# Altium PCB DPT2.2.PcbDoc (part 1 of 2)
Units mil, origin at the board's own origin, x right, y up, seen from the top; angles counter-clockwise.
Board outline 3640 x 3840 mil, 4 copper layers (Top Layer, Layer 1, Layer 2, Bottom Layer), stack 58.706 mil thick; 234 components, 56 nets, 481 pads, 759 vias.
Unrouted connection lines stored in the file: 137.
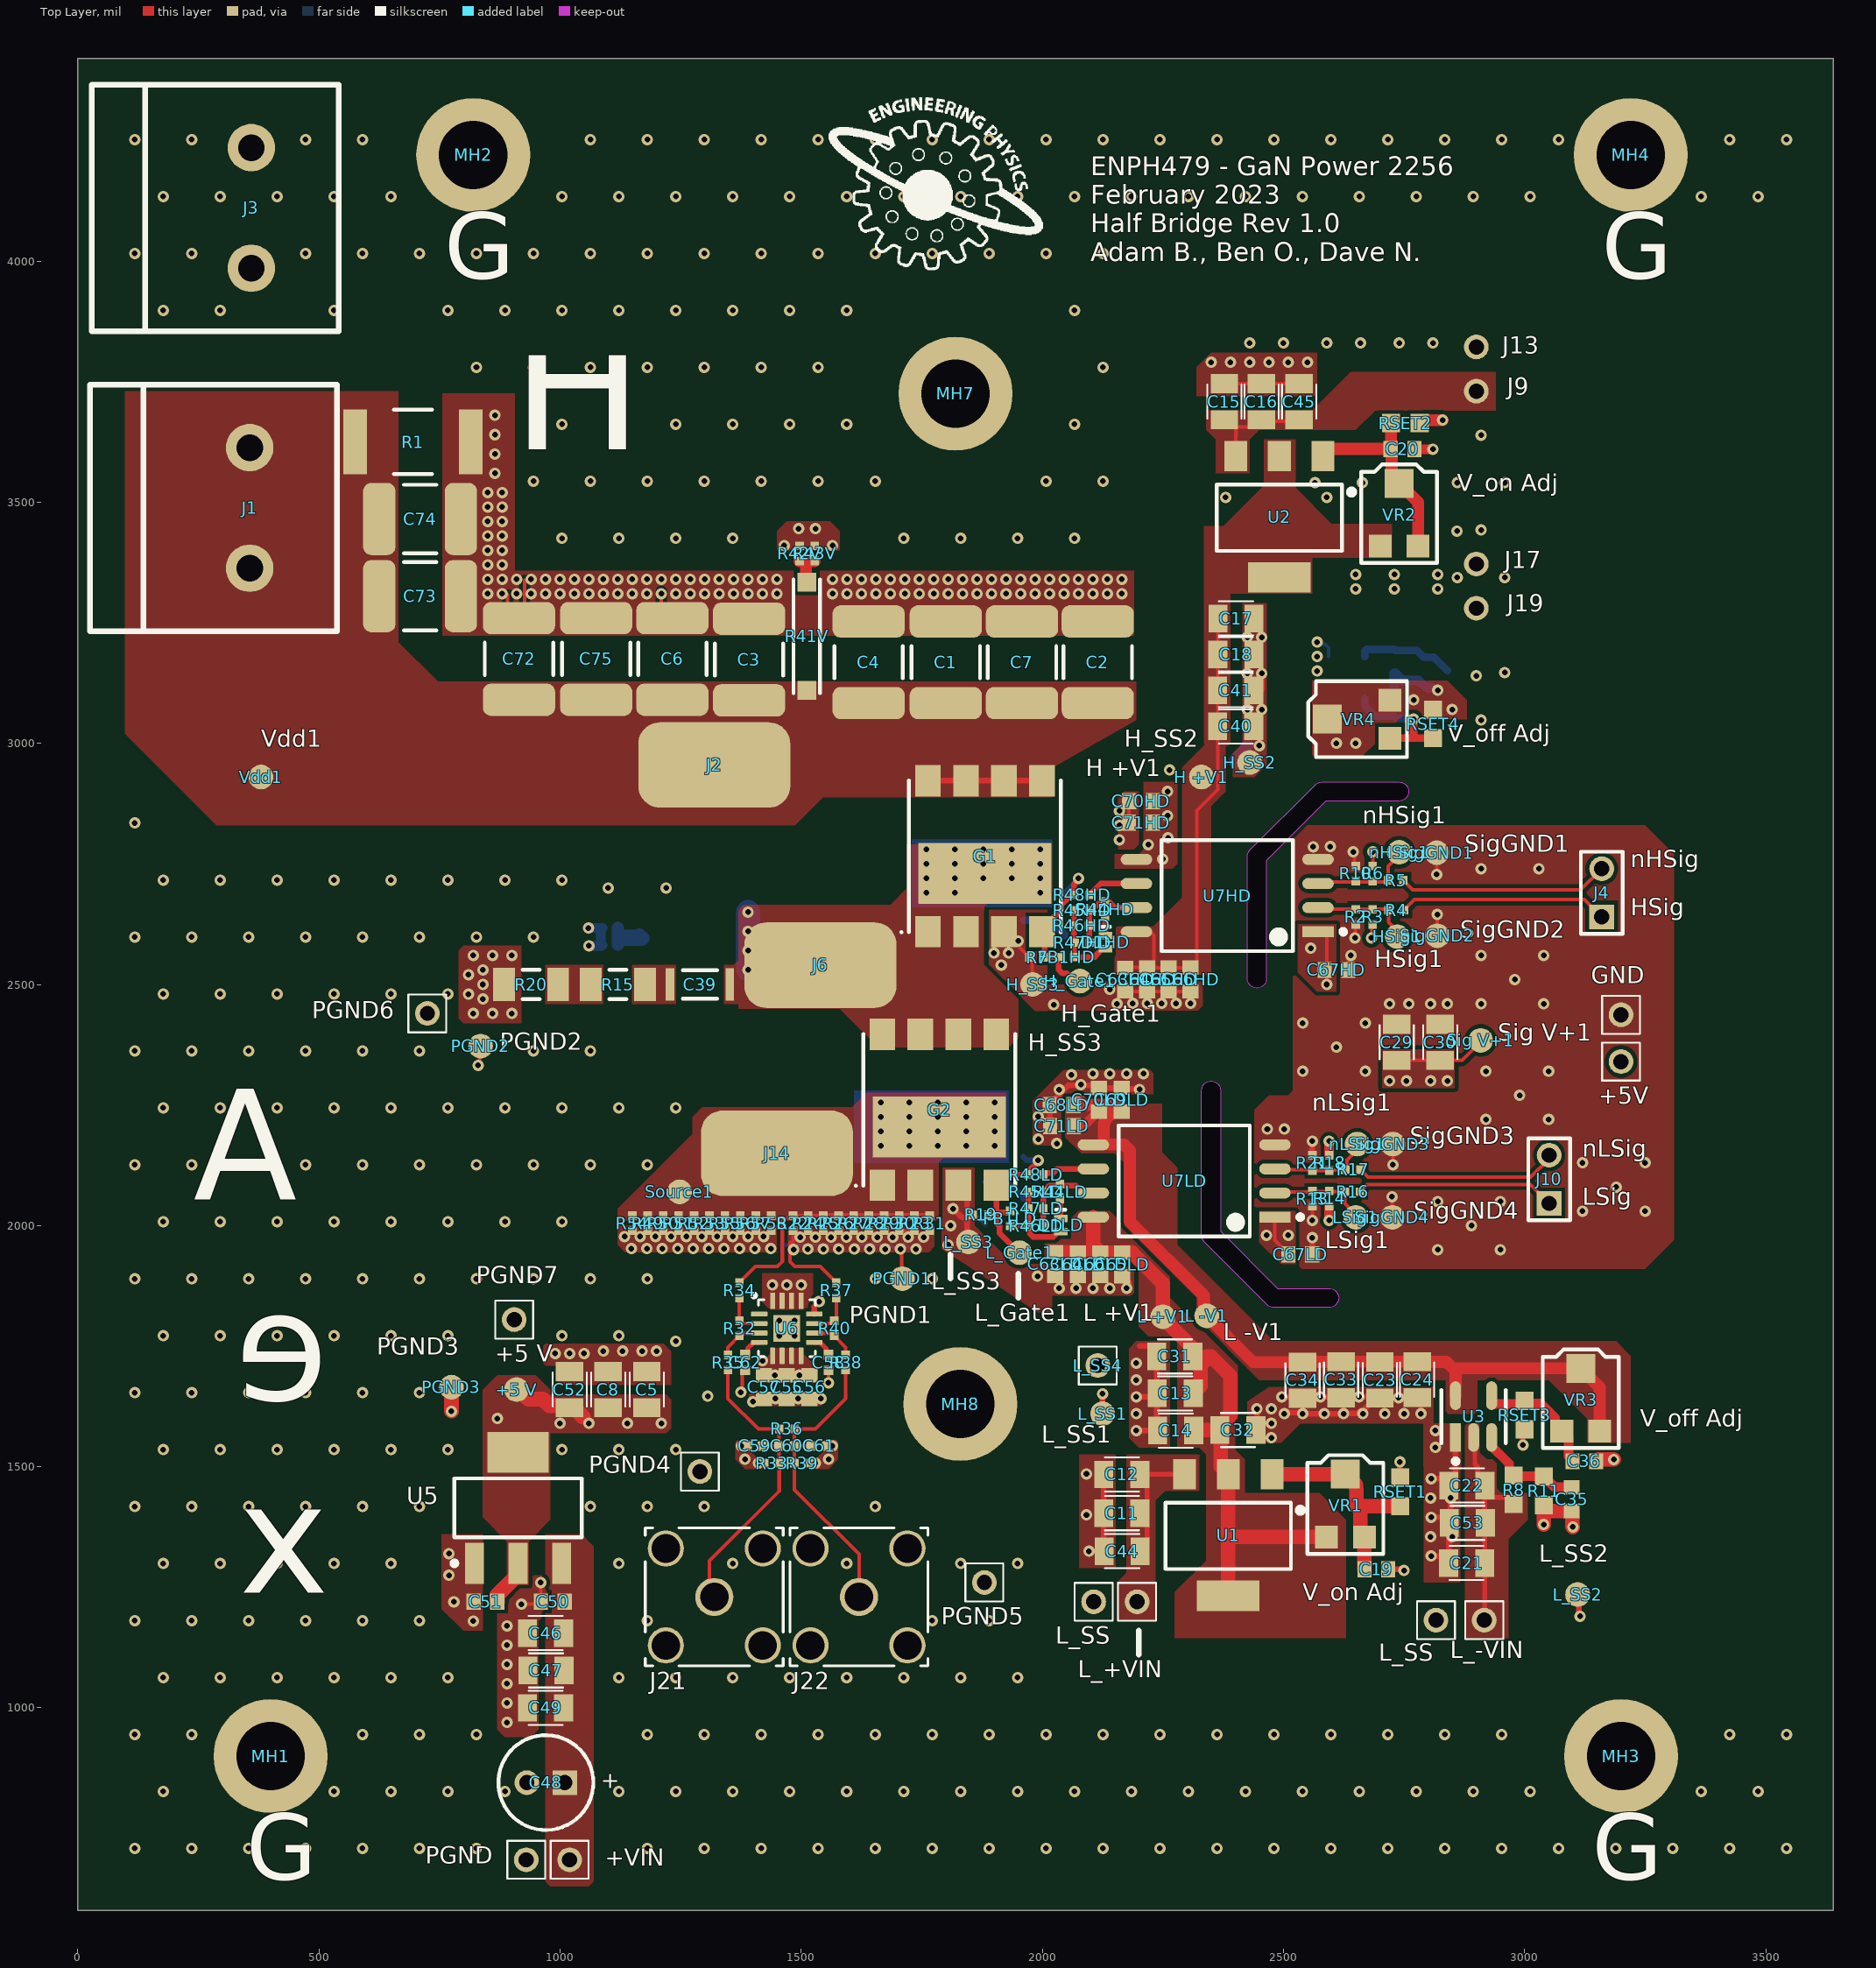
[diagram p0: Top Layer view]
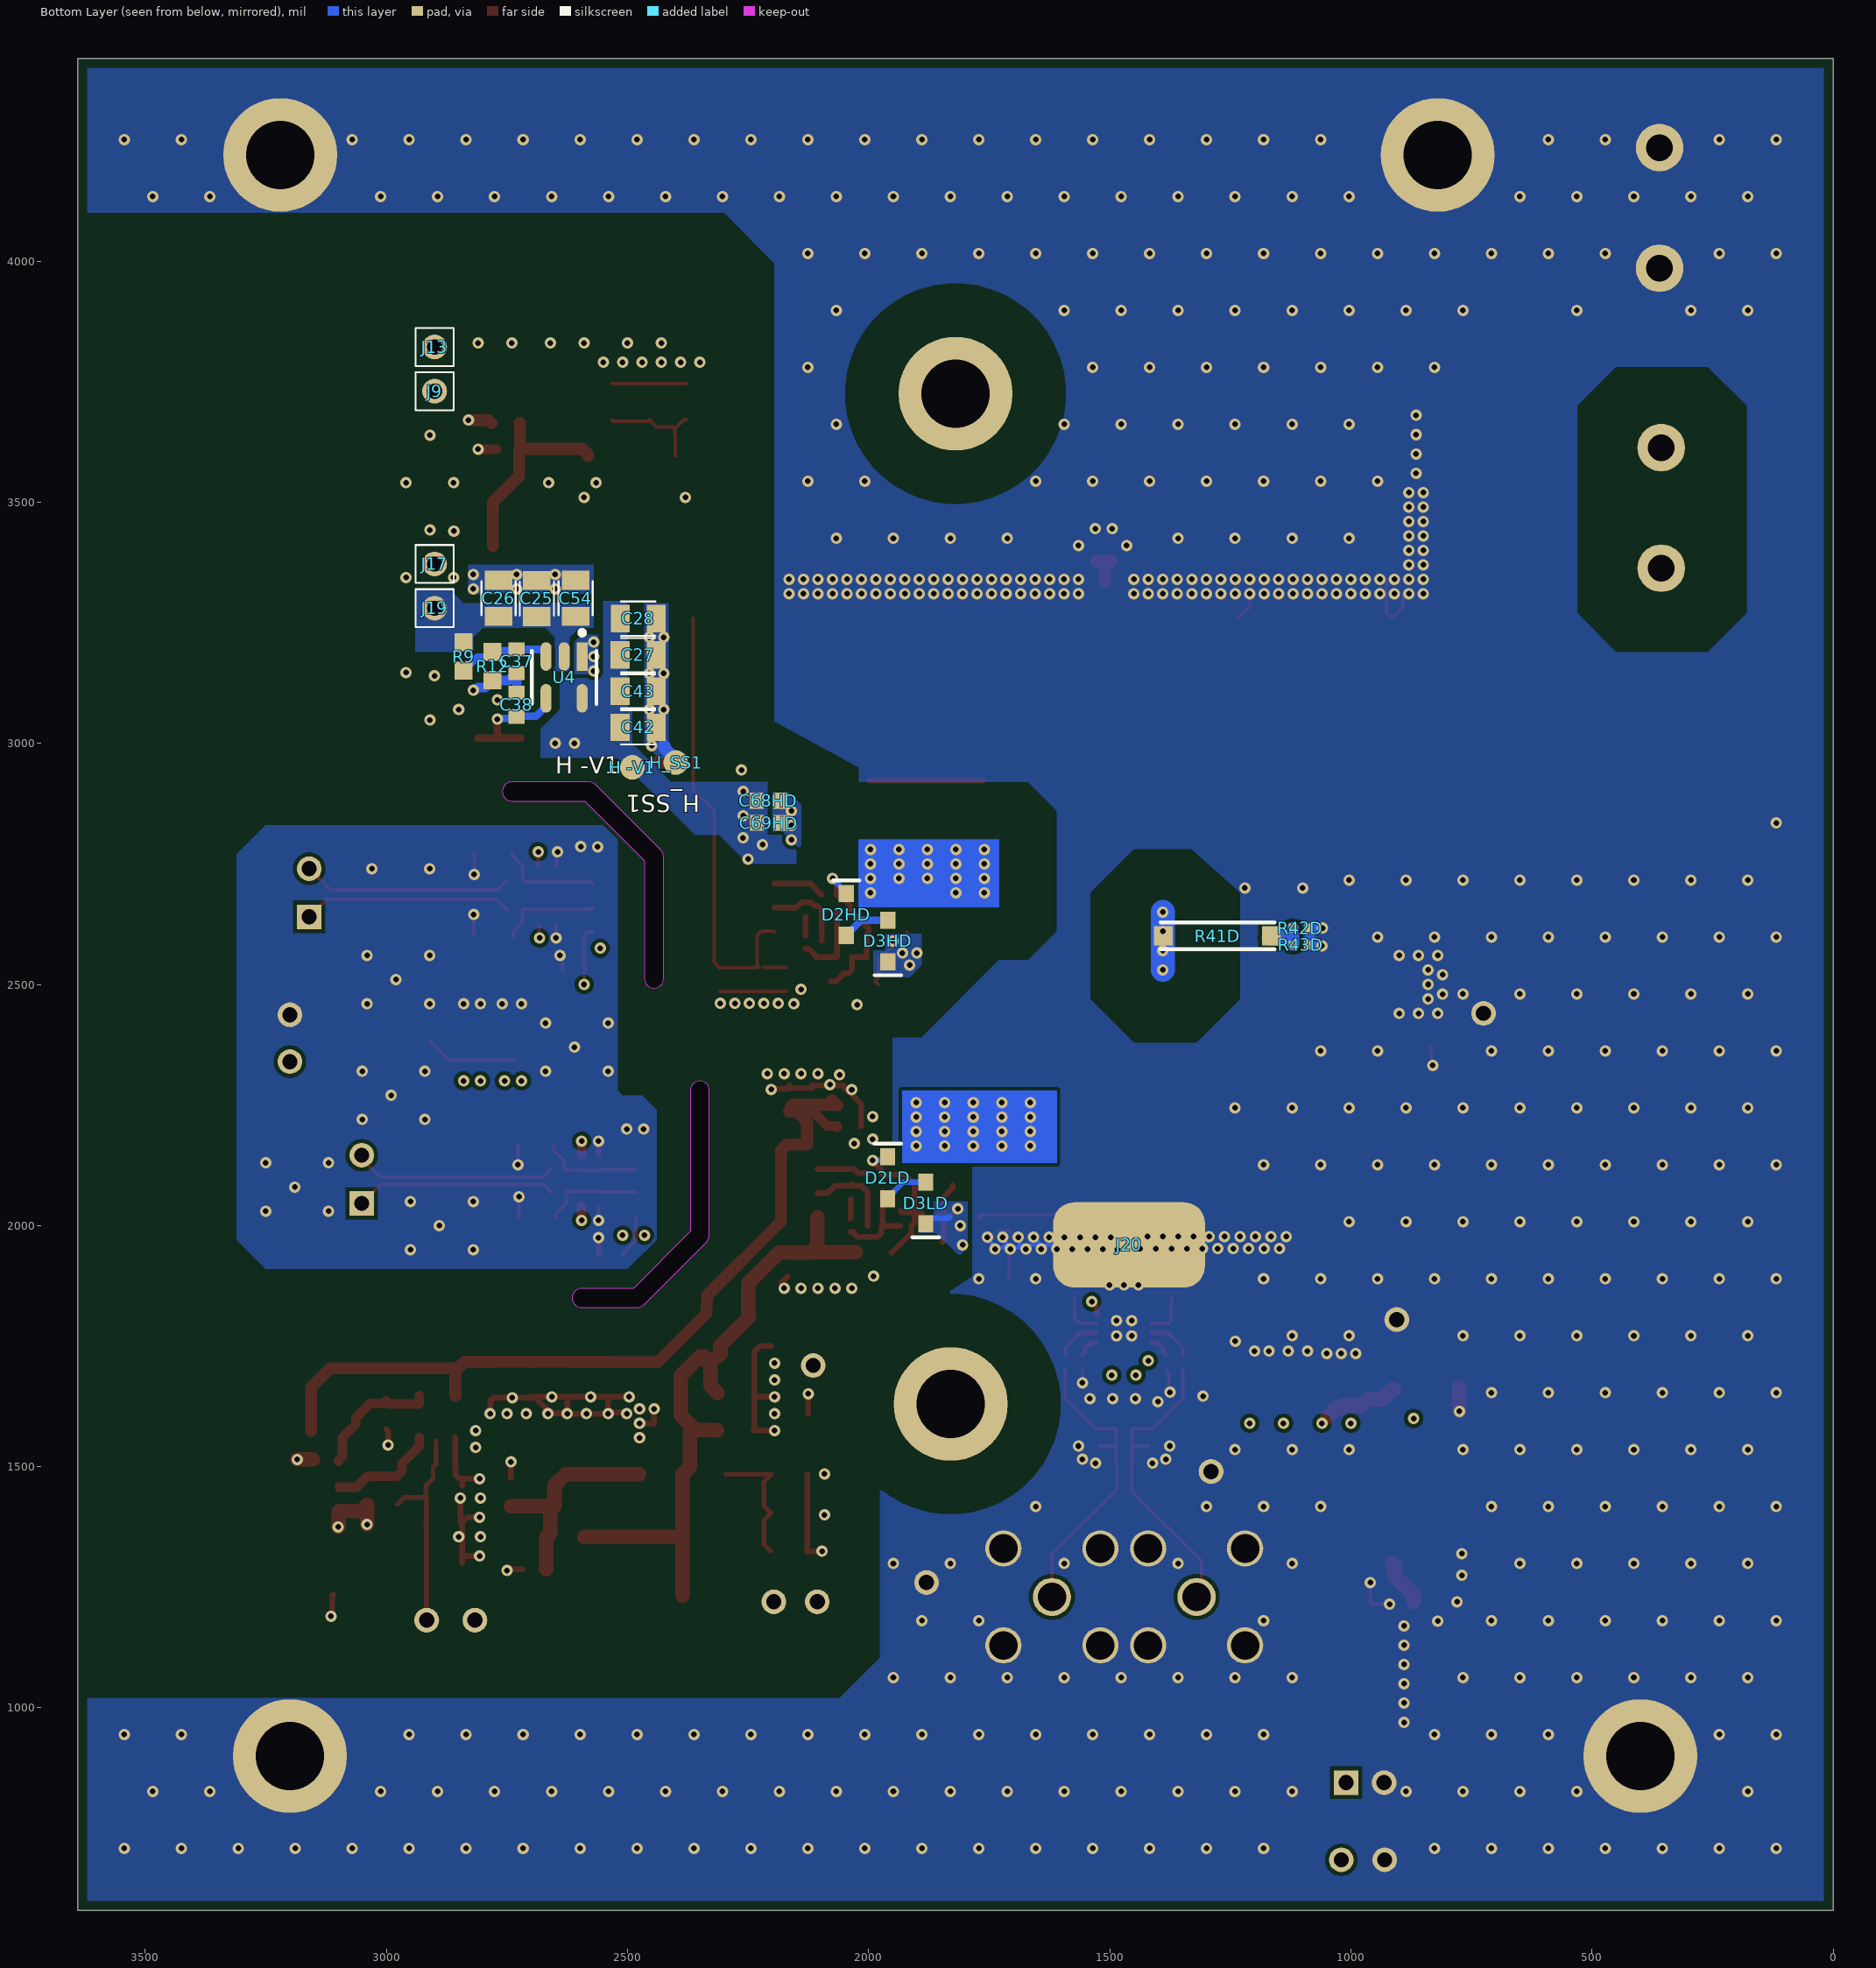
[diagram p1: Bottom Layer view, seen from below]
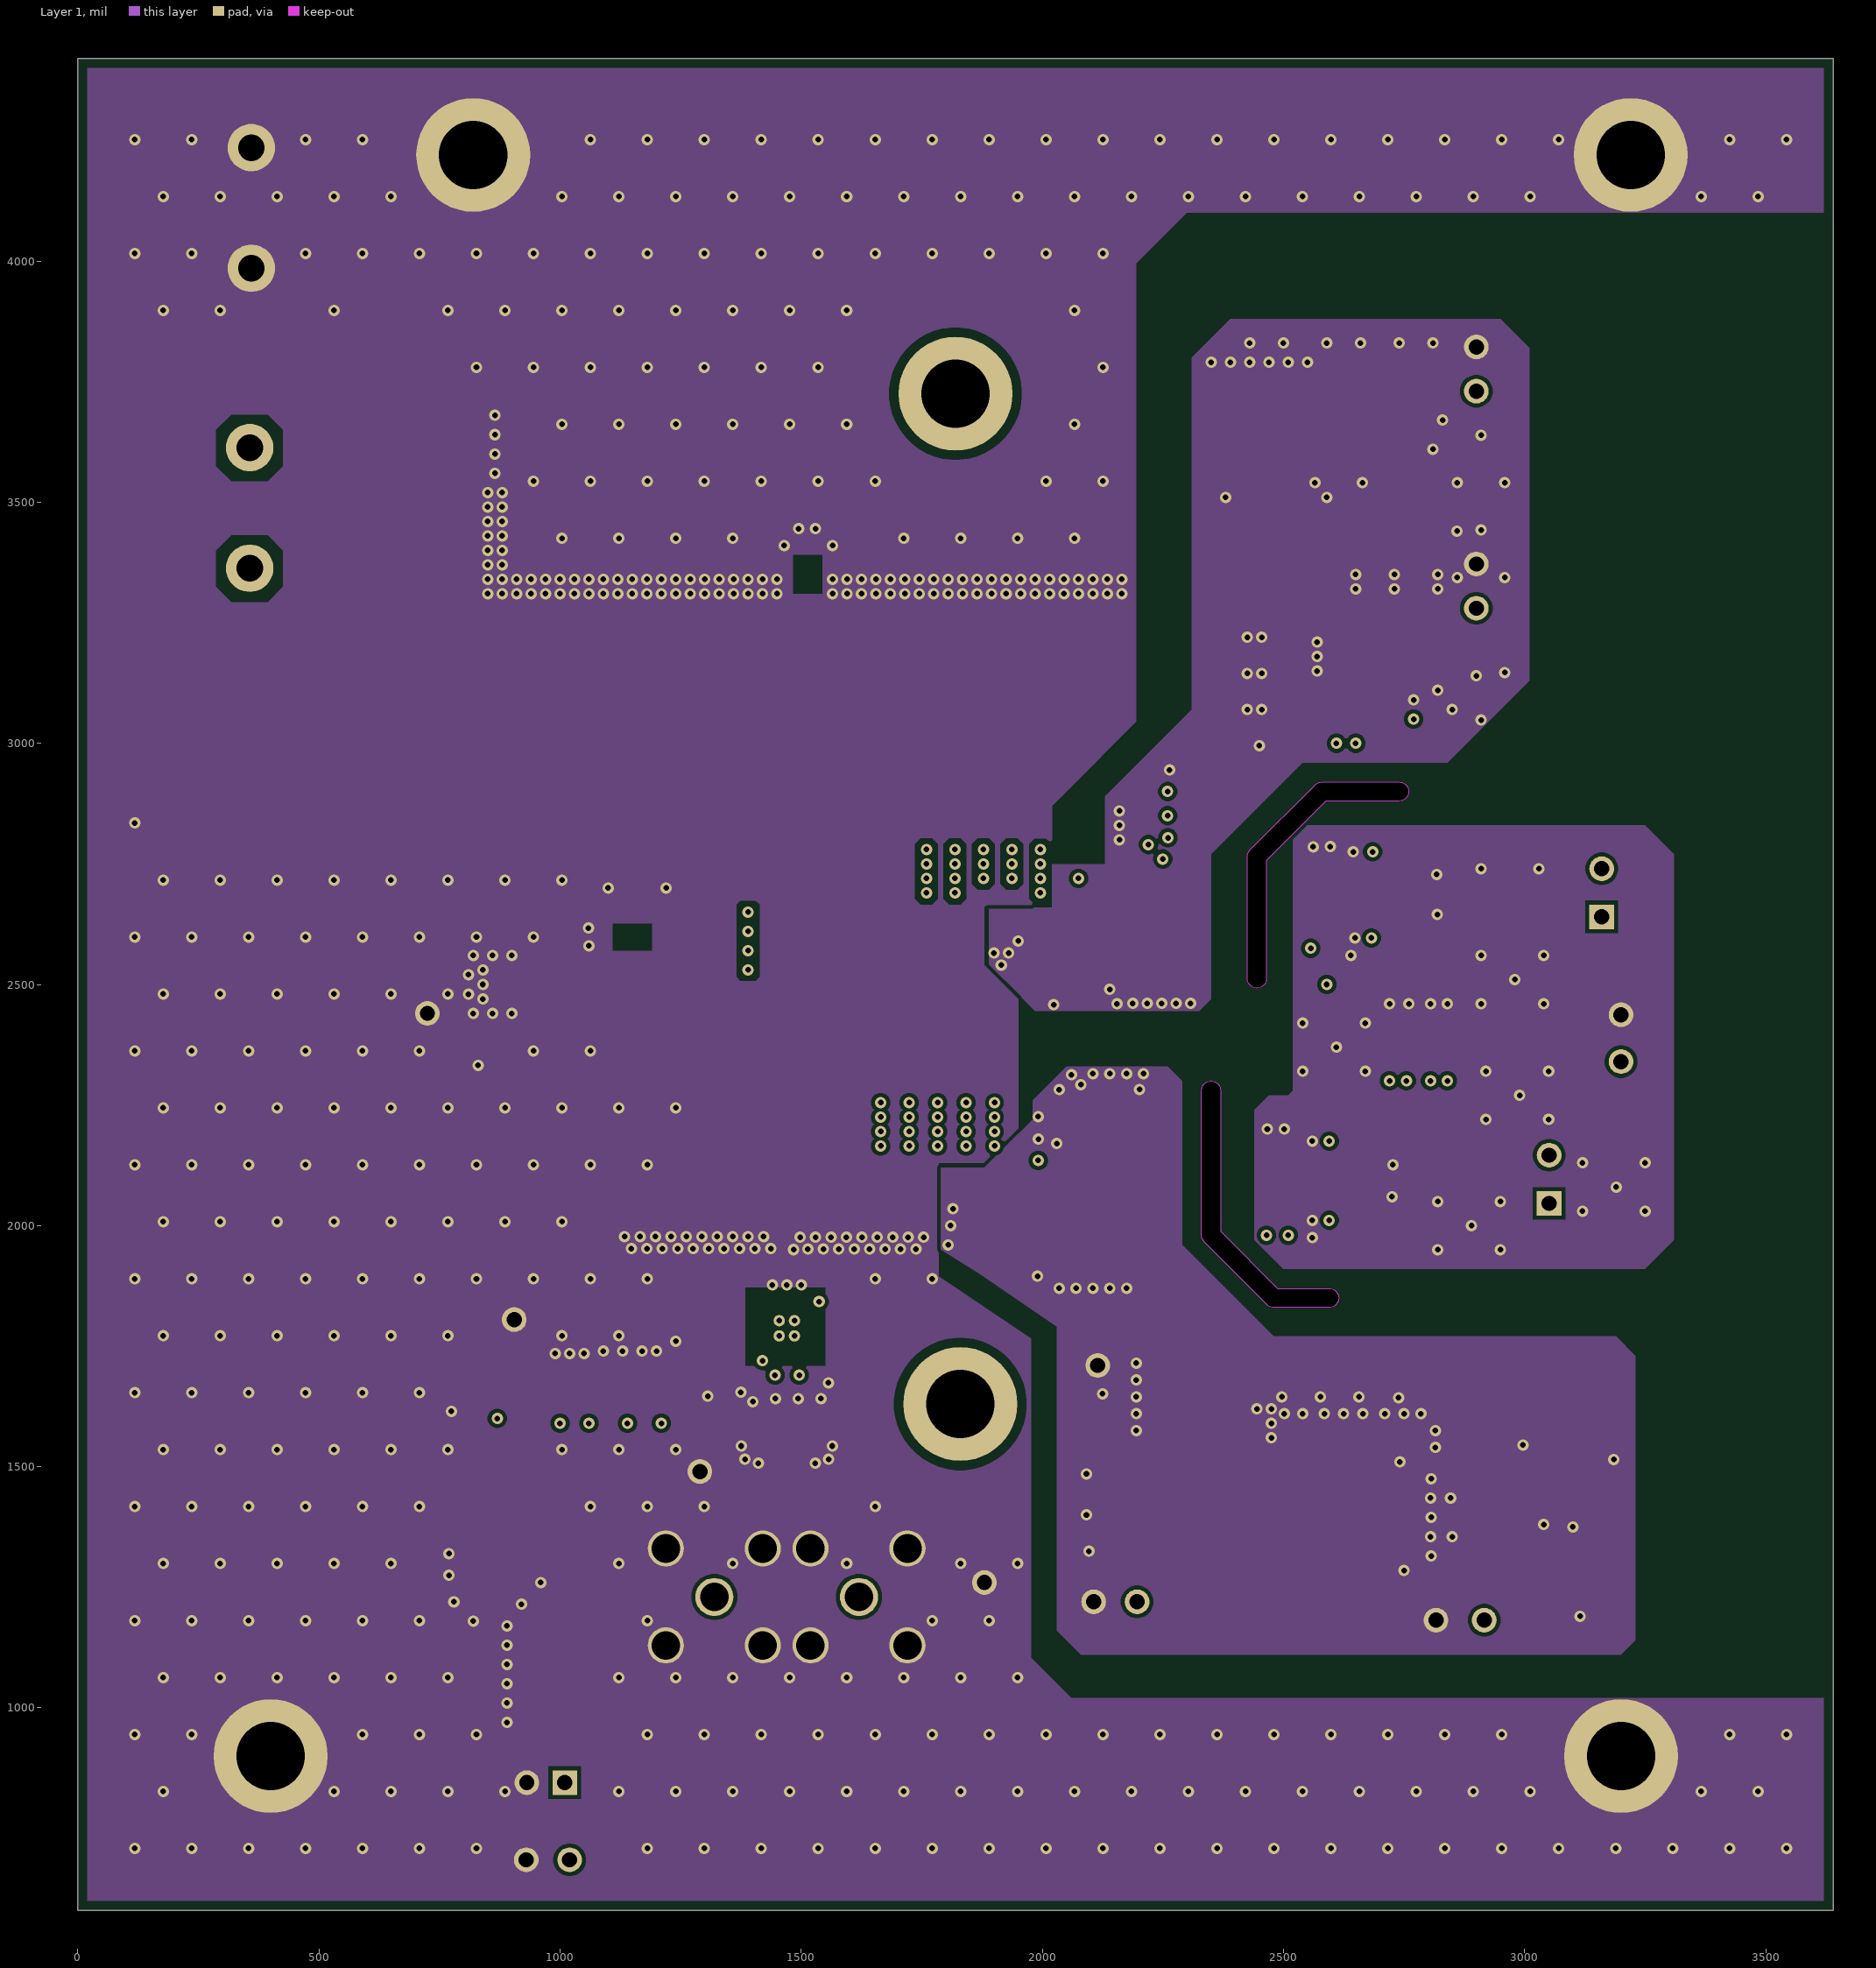
[diagram p2: Layer 1]
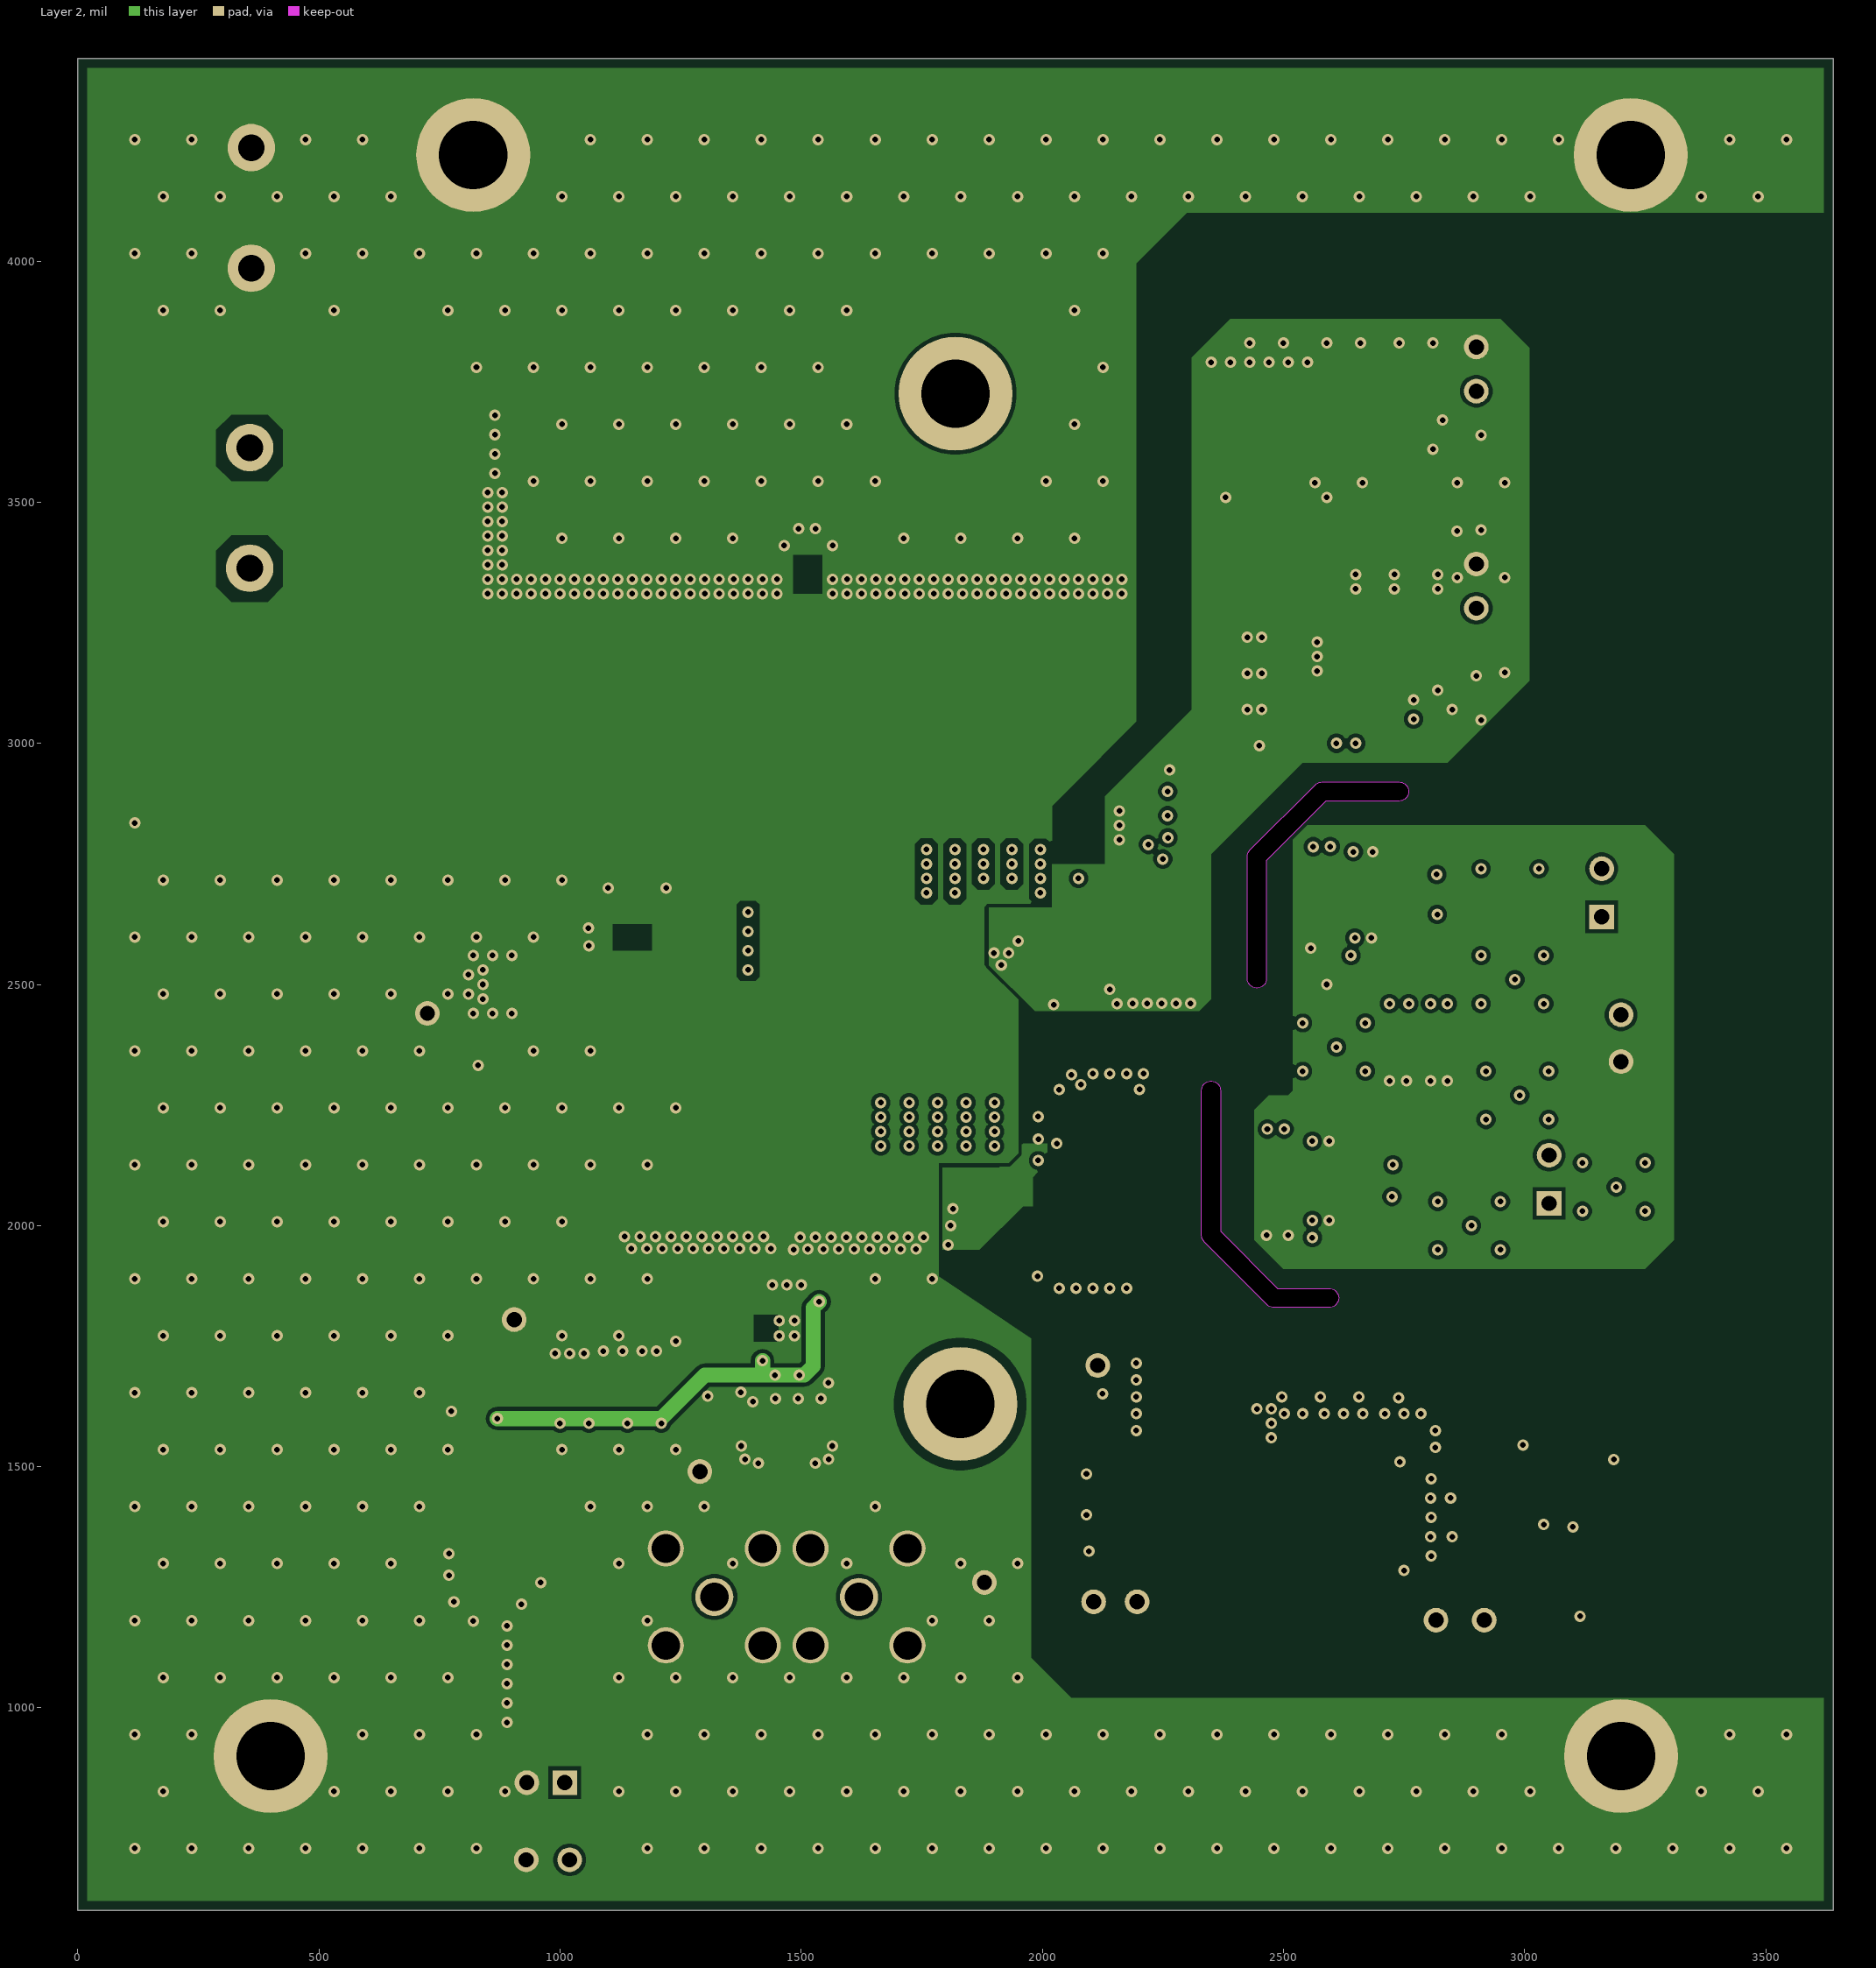
[diagram p3: Layer 2]
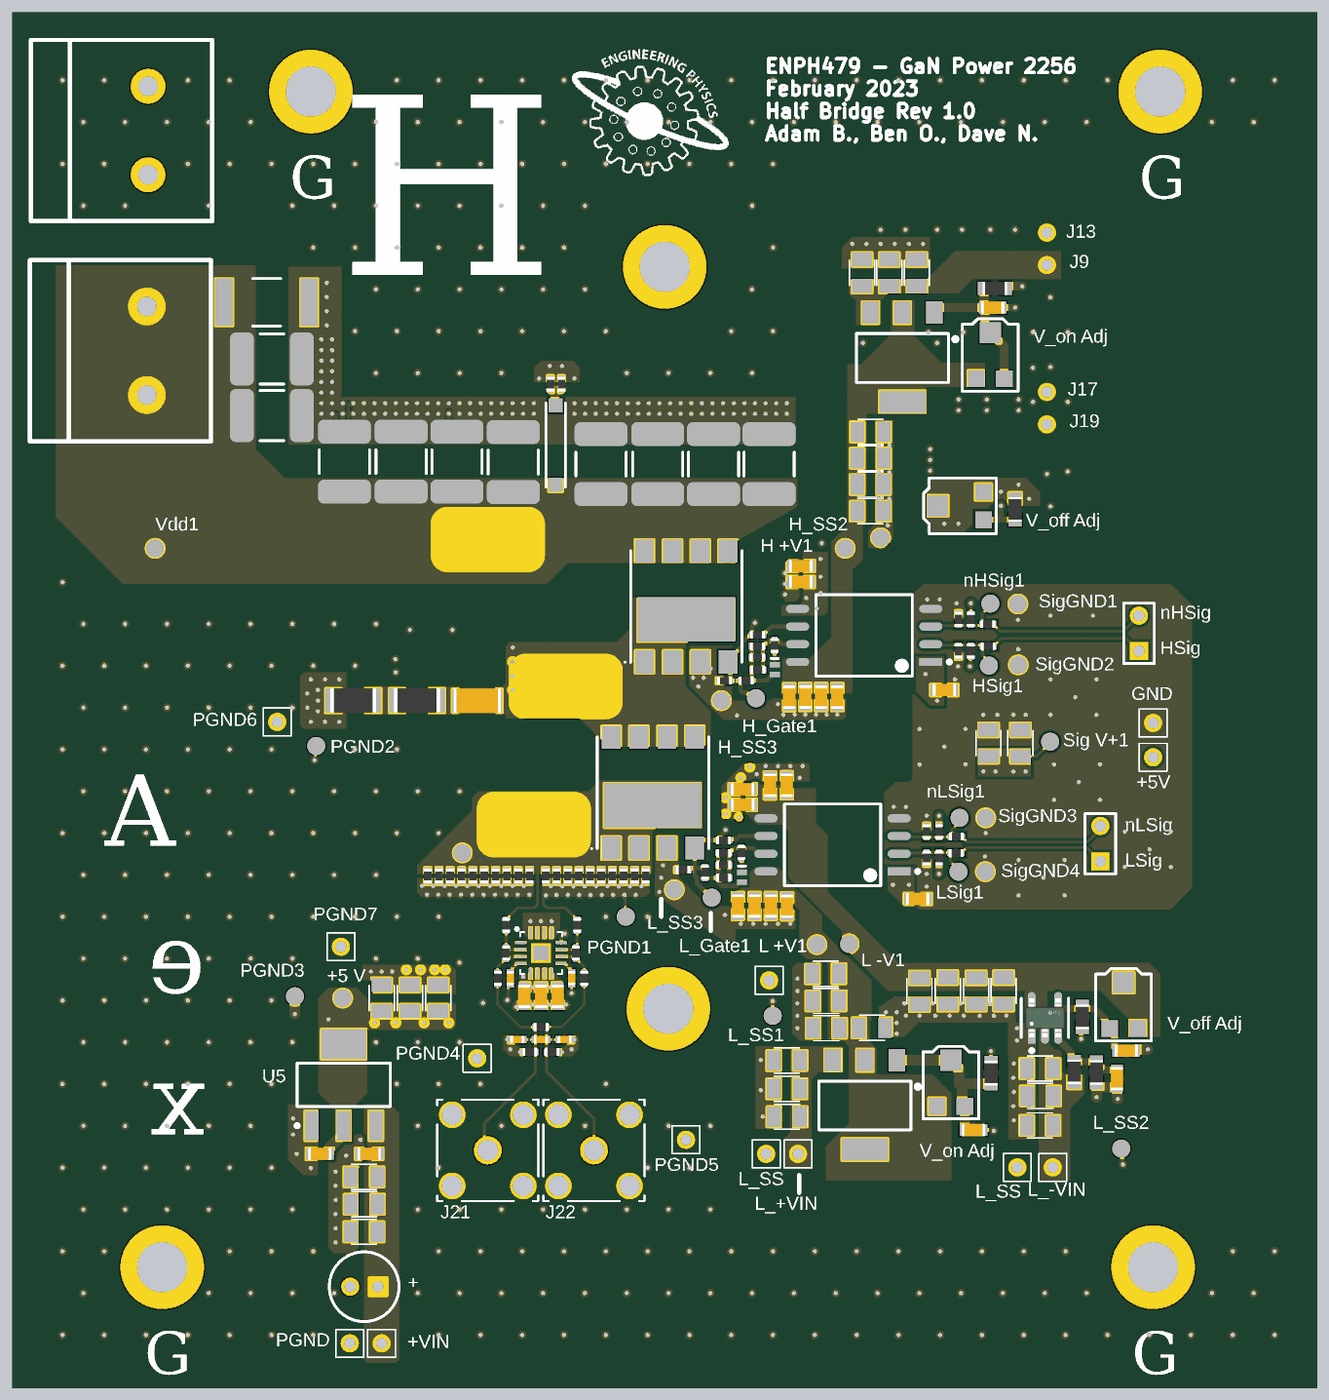
[diagram p5: 3D render of the assembled board from above, using the file's embedded part models]

## Layer stack, top to bottom
Top Solder: solder mask 0.4, Solder Resist, Dk 3.5
Top Layer: signal copper 1.4
Dielectric 2: prepreg 4.3307, PP-006, Dk 4.1
Layer 1: signal copper 1.378
Dielectric 1: dielectric 44.4882, FR-4, Dk 4.8
Layer 2: signal copper 1.378
Dielectric 3: prepreg 4.3307, PP-006, Dk 4.1
Bottom Layer: signal copper 1.4
Bottom Solder: solder mask 0.4, Solder Resist, Dk 3.5

## Board outline
0,580 3640,580 3640,4420 0,4420
cut-out: 2336.07,1966.07 cw(c2350,1980) 2330.3,1980 2330.3,2280 cw(c2350,2280) 2369.7,2280 2369.7,1988.16 2488.16,1869.7 2595,1869.7 cw(c2595,1850) 2614.7,1850 cw(c2595,1850) 2595,1830.3 2480,1830.3 cw(c2480,1850) 2466.07,1836.07 2466.08,1836.06
cut-out: 2425.3,2512.08 2425.3,2765 cw(c2445,2765) 2431.07,2778.93 2431.06,2778.92 2566.08,2913.94 2566.07,2913.93 cw(c2580,2900) 2580,2919.7 2740,2919.7 cw(c2740,2900) 2759.7,2900 cw(c2740,2900) 2740,2880.3 2588.16,2880.3 2464.7,2756.84 2464.7,2512.08 cw(c2445,2512.08)

## Design rules (kind name [scope] priority, off if disabled: settings)
Clearance Clearance_1 [InNamedPolygon('PGND_L04_P254') vs InNetClass('High Voltage')] p1: gap=118.11 ignorepadtopadclearanceinfootprint=FALSE except(0: Arc-Hole Track-Hole SMDPad-Hole THPad-Hole Via-Hole Fill-Hole Poly-Hole Region-Hole Text-Hole)
Clearance HighVoltage [InNetClass('High Voltage') vs InNetClass('High Voltage')] p2: gap=11.81 ignorepadtopadclearanceinfootprint=FALSE except(0: Arc-Hole Track-Hole SMDPad-Hole THPad-Hole Via-Hole Fill-Hole Poly-Hole Region-Hole Text-Hole)
Clearance [All] p3: gap=7.87 ignorepadtopadclearanceinfootprint=TRUE
ComponentClearance [All] p1: gap=7.87 collisioncheckmode=3 verticalgap=10 showdistances=FALSE
DiffPairsRouting [All] p1: maxlimit=15.75 minlimit=7.87 mostfreqgap=10 toplayer_minwidth=5.91 toplayer_maxwidth=15 toplayer_prefwidth=15 midlayer1_minwidth=5.91 midlayer1_maxwidth=15 midlayer1_prefwidth=15 midlayer2_minwidth=5.91 midlayer2_maxwidth=15 midlayer2_prefwidth=15 bottomlayer_minwidth=5.91 bottomlayer_maxwidth=15 bottomlayer_prefwidth=15 maxuncoupledlength=500
HoleSize [All] p1: absolutevalues=TRUE maxlimit=236.22 minlimit=11.81 maxpercent=80.000 minpercent=20.000
HoleToHoleClearance [All] p1: gap=16.14 allowstackedmicrovias=TRUE
MatchedLengths [InDifferentialPairClass('All Differential Pairs')] p1: tolerance=100 checknetsindiffpair=TRUE checkdiffpairvsdiffpair=FALSE checkxsignals=FALSE checkothers=FALSE
MinimumAnnularRing [All] p1: minimumring=5.91
MinimumSolderMaskSliver [All] p1: minsoldermaskwidth=2
PlaneConnect [All] p1: planeconnectstyle=Direct reliefexpansion=20 reliefentries=4 reliefconductorwidth=10 reliefairgap=10
PolygonConnect [All] p1: connectstyle=Direct reliefconductorwidth=10 reliefentries=4 polygonreliefangle="90 Angle" airgapwidth=10
RoutingVias [All] p1: holewidth=11.81 width=23.62 viastyle="Through Hole" minholewidth=11.81 minwidth=23.62 maxholewidth=236.22 maxwidth=50
SilkToSolderMaskClearance [IsPad] p1: minsilkscreentomaskgap=3.94 clearancetoexposedcopper=TRUE
SolderMaskExpansion [All] p1: expansion=4 istentingtop=FALSE
UnRoutedNet [All] p1: checkbadconnections=TRUE
Width [All] p1: maxlimit=393.7 minlimit=5.91 preferedwidth=7.28
22 further rules are at their usual default settings.

## Classes and differential pairs
polygon class HighVoltage: +5_L01_P198
channel class GateDriver: HD LD
component class LD: C63LD C64LD C65LD C66LD C67LD C68LD C69LD C70LD C71LD D1LD D2LD D3LD FB1LD R44LD R45LD R46LD R47LD R48LD U7LD
component class HD: C63HD C64HD C65HD C66HD C67HD C68HD C69HD C70HD C71HD D1HD D2HD D3HD FB1HD R44HD R45HD R46HD R47HD R48HD U7HD
channel class HV_Measurements: D V
component class V: R41V R42V R43V
component class D: R41D R42D R43D
component class DPT2.0: *1 *2 "+5 V" C1 C2 C3 C4 C5 C6 C7 C8 C11 C12 C13 C14 C15 C16 C17 C18 C19 C20 C21 C22 C23 C24 C25 C26 C27 C28 C29 C30 C31 C32 C33 C34 C35 C36 C37 C38 C39 C40 C41 C42 C43 C44 C45 C46 C47 C48 C49 C50 C51 C52 C53 C54 C55 C56 C57 C58 C59 C60 C61 C62 C72 C73 C74 C75 G1 G2 "H +V1" "H -V1" H_Gate1 H_SS1 H_SS2 H_SS3 HSig1 J1 J2 J3 J4 J5 J6 J7 J8 J9 J10 J11 J12 J13 J14 J15 J16 J17 J18 J19 J20 J21 J22 "L +V1" "L -V1" L_Gate1 L_SS1 L_SS2 L_SS3 LSig1 MH1 MH2 MH3 MH4 MH7 MH8 nHSig1 nLSig1 PGND1 PGND2 PGND3 R1 R2 R3 R4 R5 R6 R7 R8 R9 R10 R11 R12 R13 R14 R15 R16 R17 R18 R19 R20 R21 R22 R23 R24 R25 R26 R27 R28 R29 R30 R31 R32 R33 R34 R35 R36 R37 R38 R39 R40 R49 R50 R51 R52 R53 R54 R55 R56 R57 R58 RSET1 RSET2 RSET3 RSET4 "Sig V+1" SigGND1 SigGND2 SigGND3 SigGND4 Source1 U1 U2 U3 U4 U5 U6 Vdd1 VR1 VR2 VR3 VR4

## Components (designator, comment, footprint, x,y, rotation, side; value= is the part's Value field where it differs from the comment)
"+5 V" "Testpoint" Testpoint-Footprint-1 910,1660 r0 top
+5V "PIN_M" J_THT_1_PIN 3200,2340 r180 top (schematic designator J5)
+VIN "PIN_M" J_THT_1_PIN 1020,685 r180 top (schematic designator J11)
C1 "CAP-1812" CAP_1812 1800,3168 r90 top value=0.1u
C2 "CAP-1812" CAP_1812 2115,3168 r90 top value=0.1u
C3 "CAP-1812" CAP_1812 1392,3173.65 r90 top value=0.1u
C4 "CAP-1812" CAP_1812 1640,3168 r90 top value=0.1u
C5 "CAP-0805" CAP_0805_MED 1180,1660 r270 top value=1u
C6 "CAP-1812" CAP_1812 1233,3175 r90 top value=0.1u
C7 "CAP-1812" CAP_1812 1958,3168 r90 top value=0.1u
C8 "CAP-0805" CAP_0805_MED 1100,1660 r270 top value=1u
C11 "CAP-0805" CAP_0805_MED 2164.95,1403.74 r180 top value=1u
C12 "CAP-0805" CAP_0805_MED 2165.02,1484 r180 top value=1u
C13 "CAP-0805" CAP_0805_MED 2275.61,1652 r180 top value=1u
C14 "CAP-0805" CAP_0805_MED 2276.61,1575 r180 top value=1u
C15 "CAP-0805" CAP_0805_MED 2377.59,3708.31 r90 top value=1u
C16 "CAP-0805" CAP_0805_MED 2454.59,3708.31 r90 top value=1u
C17 "CAP-0805" CAP_0805_MED 2401.6,3259 r0 top value=1u
C18 "CAP-0805" CAP_0805_MED 2401.41,3184.56 r0 top value=1u
C19 "CAP-0603" CAP_0603_HIGH 2692.61,1287.48 r180 top value=1u
C20 "CAP-0603" CAP_0603_HIGH 2747,3610 r180 top value=1u
C21 "CAP-0805" CAP_0805_MED 2879.98,1300.39 r180 top value=1u
C22 "CAP-0805" CAP_0805_MED 2880.42,1461 r180 top value=1u
C23 "CAP-0805" CAP_0805_MED 2700.02,1680 r270 top value=1u
C24 "CAP-0805" CAP_0805_MED 2777.4,1680.44 r270 top value=1u
C25 "CAP-0805" CAP_0805_MED 2688,3300 r90 bottom value=1u
C26 "CAP-0805" CAP_0805_MED 2767.48,3300.59 r90 bottom value=1u
C27 "CAP-0805" CAP_0805_MED 2478,3183 r180 bottom value=1u
C28 "CAP-0805" CAP_0805_MED 2477.81,3258.48 r180 bottom value=1u
C29 "CAP-0805" CAP_0805_MED 2735,2380 r90 top value=1u
C30 "CAP-0805" CAP_0805_MED 2825,2380 r90 top value=1u
C31 "CAP-0805" CAP_0805_MED 2274.75,1728.77 r180 top value=1u
C32 "CAP-0805" CAP_0805_MED 2405.61,1576 r0 top value=1u
C33 "CAP-0805" CAP_0805_MED 2619.61,1680.4 r270 top value=1u
C34 "CAP-0805" CAP_0805_MED 2539.61,1679.4 r270 top value=1u
C35 "CAP-0603" CAP_0603_HIGH 3097.72,1432.76 r90 top value=1u
C36 "CAP-0603" CAP_0603_HIGH 3124,1511.25 r180 top value=1u
C37 "CAP-0603" CAP_0603_HIGH 2730,3170 r90 bottom value=1u
C38 "CAP-0603" CAP_0603_HIGH 2730,3080 r270 bottom value=1u
C39 "CAP-1206-HV" CAP_1206_HV 1290,2500 r180 top value=10p
C40 "CAP-0805" CAP_0805_MED 2401,3035 r0 top value=1u
C41 "CAP-0805" CAP_0805_MED 2401,3110 r0 top value=1u
C42 "CAP-0805" CAP_0805_MED 2478,3033 r180 bottom value=1u
C43 "CAP-0805" CAP_0805_MED 2478,3108 r180 bottom value=1u
C44 "CAP-0805" CAP_0805_MED 2165.7,1324.98 r180 top value=1u
C45 "CAP-0805" CAP_0805_MED 2532.59,3708.31 r90 top value=1u
C46 "CAP-0805" CAP_0805_MED 970,1155 r180 top value=1u
C47 "CAP-0805" CAP_0805_MED 970.93,1077.64 r180 top value=1u
C48 "PCAP-2MMx5MM" PCAP_2MM_5MM 970.63,845 r180 top value=100u
C49 "CAP-0805" CAP_0805_MED 970,1000 r0 top value=1u
C50 "CAP-0603" CAP_0603_HIGH 985,1220 r0 top value=1u
C51 "CAP-0603" CAP_0603_HIGH 845.39,1220 r0 top value=1u
C52 "CAP-0805" CAP_0805_MED 1020,1660 r270 top value=1u
C53 "CAP-0805" CAP_0805_MED 2881.48,1383.58 r0 top value=1u
C54 "CAP-0805" CAP_0805_MED 2607.48,3300.59 r270 bottom value=1u
C55 "CAP-0603" CAP_0603_HIGH 1470.35,1665.02 r90 top value=0.1u
C56 "CAP-0603" CAP_0603_HIGH 1517.59,1665.02 r90 top value=1u
C57 "CAP-0603" CAP_0603_HIGH 1423.1,1665.02 r90 top value=1u
C58 "CAP-0402" CAP_0402_HIGH 1556.96,1716.2 r90 top value=0.1u
C59 "CAP-0402" CAP_0402_HIGH 1403.42,1542.97 r0 top value=1p
C60 "CAP-0402" CAP_0402_HIGH 1470.35,1542.97 r0 top value=3p
C61 "CAP-0402" CAP_0402_HIGH 1537.28,1542.97 r0 top value=1p
C62 "CAP-0402" CAP_0402_HIGH 1383.73,1716.2 r90 top value=0.1u
C63HD "CAP-0603" CAP_0603_HIGH 2171.61,2510 r90 top value=1u (schematic designator C63)
C63LD "CAP-0603" CAP_0603_HIGH 2026.61,1920 r90 top value=1u (schematic designator C63)
C64HD "CAP-0603" CAP_0603_HIGH 2217.49,2510.58 r90 top value=1u (schematic designator C64)
C64LD "CAP-0603" CAP_0603_HIGH 2074.02,1919.78 r90 top value=1u (schematic designator C64)
C65HD "CAP-0603" CAP_0603_HIGH 2261.82,2510.16 r90 top value=1u (schematic designator C65)
C65LD "CAP-0603" CAP_0603_HIGH 2165.58,1919.38 r90 top value=1u (schematic designator C65)
C66HD "CAP-0603" CAP_0603_HIGH 2307.49,2510.18 r90 top value=1u (schematic designator C66)
C66LD "CAP-0603" CAP_0603_HIGH 2119.91,1919.87 r90 top value=1u (schematic designator C66)
C67HD "CAP-0603" CAP_0603_HIGH 2610,2530 r0 top value=1u (schematic designator C67)
C67LD "CAP-0603" CAP_0603_HIGH 2535,1940 r0 top value=1u (schematic designator C67)
C68HD "CAP-0603" CAP_0603_HIGH 2207.61,2881 r180 bottom value=1u (schematic designator C68)
C68LD "CAP-0603" CAP_0603_HIGH 2040,2250 r180 top value=1u (schematic designator C68)
C69HD "CAP-0603" CAP_0603_HIGH 2207.1,2834.99 r180 bottom value=1u (schematic designator C69)
C69LD "CAP-0603" CAP_0603_HIGH 2164.81,2260.96 r90 top value=1u (schematic designator C69)
C70HD "CAP-0603" CAP_0603_HIGH 2204.61,2880 r180 top value=1u (schematic designator C70)
C70LD "CAP-0603" CAP_0603_HIGH 2117.21,2260.84 r90 top value=1u (schematic designator C70)
C71HD "CAP-0603" CAP_0603_HIGH 2204.38,2835.2 r180 top value=1u (schematic designator C71)
C71LD "CAP-0603" CAP_0603_HIGH 2040.65,2206.22 r180 top value=1u (schematic designator C71)
C72 "CAP-1812" CAP_1812 915,3175 r90 top value=0.1u
C73 "CAP-1812" CAP_1812 710,3305 r0 top value=0.1u
C74 "CAP-1812" CAP_1812 710,3465 r0 top value=0.1u
C75 "CAP-1812" CAP_1812 1075,3175 r90 top value=0.1u
D1HD "CDBQC0130L-HF" DIO_SOD-923F 2130.91,2587.79 r270 top (schematic designator D1)
D1LD "CDBQC0130L-HF" DIO_SOD-923F 2038.29,2001.25 r270 top (schematic designator D1)
D2HD "DIO_323F_ZENER" DIO_SOD-323F 2046.61,2645 r270 bottom value=6.2V (schematic designator D2)
D2LD "DIO_323F_ZENER" DIO_SOD-323F 1960.61,2099 r270 bottom value=6.2V (schematic designator D2)
D3HD "DIO_323F_ZENER" DIO_SOD-323F 1960,2590 r90 bottom value=6.2V (schematic designator D3)
D3LD "DIO_323F_ZENER" DIO_SOD-323F 1881.61,2046.69 r90 bottom value=6.2V (schematic designator D3)
FB1HD "RES-0402" RES_0402_HIGH 2050.06,2556.8 r180 top value=1k (schematic designator FB1)
FB1LD "RES-0402" RES_0402_HIGH 1933.61,2015 r90 top value=1k (schematic designator FB1)
G1 "GPI65030DFN" DFN_8X8 1881.14,2765.77 r90 top
G2 "GPI65030DFN" DFN_8X8 1786.61,2240 r90 top
GND "PIN_M" J_THT_1_PIN 3200,2437 r180 top (schematic designator J7)
"H +V1" "Testpoint" Testpoint-Footprint-1 2330,2930 r0 top
"H -V1" "Testpoint" Testpoint-Footprint-1 2490,2950 r180 bottom
H_Gate1 "Testpoint" Testpoint-Footprint-1 2077.86,2506.88 r0 top
H_SS1 "Testpoint" Testpoint-Footprint-1 2400,2960 r0 bottom
H_SS2 "Testpoint" Testpoint-Footprint-1 2430,2960 r0 top
H_SS3 "Testpoint" Testpoint-Footprint-1 1980,2500 r0 top
HSig1 "Testpoint" Testpoint-Footprint-1 2736,2599 r180 top
J1 "TERM_1X2" J_TERM_BLK_1X2 356.61,3488 r270 top
J2 "CONN_PAD" CONN_PAD 1320,2955 r0 top
J3 "TERM_1X2" J_TERM_BLK_1X2 360,4110 r270 top
J4 "PIN_M_1X2" J_THT_2.54MM_1X2 3160,2740 r90 top
J6 "CONN_PAD" CONN_PAD 1540,2540 r180 top
J9 "PIN_M" J_THT_1_PIN 2900,3730 r180 bottom
J10 "PIN_M_1X2" J_THT_2.54MM_1X2 3051,2146 r90 top
J13 "PIN_M" J_THT_1_PIN 2900,3821.73 r180 bottom
J14 "CONN_PAD" CONN_PAD 1450,2150 r180 top
J17 "PIN_M" J_THT_1_PIN 2900,3371.73 r270 bottom
J19 "PIN_M" J_THT_1_PIN 2900,3280 r270 bottom
J20 "CONN_PAD" CONN_PAD 1460,1960 r0 bottom
J21 "SMA_VERT_F" SMA_VERT_F 1320,1230 r0 top
J22 "SMA_VERT_F" SMA_VERT_F 1620,1230 r0 top
"L +V1" "Testpoint" Testpoint-Footprint-1 2250,1811 r0 top
"L -V1" "Testpoint" Testpoint-Footprint-1 2341,1813 r0 top
L_+VIN "PIN_M" J_THT_1_PIN 2196.61,1220 r90 top (schematic designator J8)
L_-VIN "PIN_M" J_THT_1_PIN 2916.4,1181.83 r180 top (schematic designator J18)
L_Gate1 "Testpoint" Testpoint-Footprint-1 1952.8,1943.84 r0 top
L_SS "PIN_M" J_THT_1_PIN 2816.4,1181.83 r180 top (schematic designator J16)
L_SS "PIN_M" J_THT_1_PIN 2106.61,1220 r90 top (schematic designator J12)
L_SS1 "Testpoint" Testpoint-Footprint-1 2125,1610 r90 top
L_SS2 "Testpoint" Testpoint-Footprint-1 3110,1235 r90 top
L_SS3 "Testpoint" Testpoint-Footprint-1 1847,1966 r0 top
L_SS4 "PIN_M" J_THT_1_PIN 2115,1710 r90 top
LSig1 "Testpoint" Testpoint-Footprint-1 2650,2017 r90 top
MH1 "Mounting Hole" "Mounting Hole-Footprint-1" 400,900 r0 top
MH2 "Mounting Hole" "Mounting Hole-Footprint-1" 820,4220 r0 top
MH3 "Mounting Hole" "Mounting Hole-Footprint-1" 3200,900 r0 top
MH4 "Mounting Hole" "Mounting Hole-Footprint-1" 3220,4220 r0 top
MH7 "Mounting Hole" "Mounting Hole-Footprint-1" 1820,3725 r0 top
MH8 "Mounting Hole" "Mounting Hole-Footprint-1" 1830,1630 r0 top
nHSig1 "Testpoint" Testpoint-Footprint-1 2740,2774 r0 top
nLSig1 "Testpoint" Testpoint-Footprint-1 2653,2169 r0 top
PGND "PIN_M" J_THT_1_PIN 930,685 r0 top (schematic designator J15)
PGND1 "Testpoint" Testpoint-Footprint-1 1710,1890 r0 top
PGND2 "Testpoint" Testpoint-Footprint-1 835.36,2372.02 r180 top
PGND3 "Testpoint" Testpoint-Footprint-1 775,1665 r0 top
PGND4 "PIN_M" J_THT_1_PIN 1290,1490 r0 top
PGND5 "PIN_M" J_THT_1_PIN 1880,1260 r0 top
PGND6 "PIN_M" J_THT_1_PIN 725,2440 r0 top
PGND7 "PIN_M" J_THT_1_PIN 905,1805 r0 top
R1 "RES-2512" RES_2512_MED 695,3625 r0 top value=1M
R2 "RES-0402" RES_0402_HIGH 2650,2640 r90 top value=100
R3 "RES-0402" RES_0402_HIGH 2685,2640 r270 top value=100
R4 "RES-0402" RES_0402_HIGH 2734,2654 r180 top value=0
R5 "RES-0402" RES_0402_HIGH 2732.75,2716 r180 top value=0
R6 "RES-0402" RES_0402_HIGH 2685,2729.75 r90 top value=100
R7 "RES-0402" RES_0402_HIGH 1989.23,2556.22 r0 top value=10
R8 "RES-0603" RES_0603_MED 2977.02,1452 r90 top value=1k
R9 "RES-0603" RES_0603_MED 2840,3180 r270 bottom value=1k
R10 "RES-0402" RES_0402_HIGH 2650,2730 r270 top value=100
R11 "RES-0603" RES_0603_MED 3040,1450 r270 top value=1k
R12 "RES-0603" RES_0603_MED 2780,3160 r270 bottom value=1k
R13 "RES-0402" RES_0402_HIGH 2560,2055.75 r90 top value=100
R14 "RES-0402" RES_0402_HIGH 2595,2056 r270 top value=100
R15 "RES-1206" RES_1206_MED 1120,2500 r0 top value=1k
R16 "RES-0402" RES_0402_HIGH 2643,2070 r180 top value=0
R17 "RES-0402" RES_0402_HIGH 2644,2116 r180 top value=0
R18 "RES-0402" RES_0402_HIGH 2595,2130 r90 top value=100
R19 "RES-0402" RES_0402_HIGH 1871.9,2022.53 r0 top value=10
R20 "RES-1206" RES_1206_MED 940,2500 r0 top value=1k
R21 "RES-0402" RES_0402_HIGH 2560,2130 r270 top value=100
R22 "RES-0402" RES_0402_HIGH 1483.03,2005 r90 top value=0.1
R23 "RES-0402" RES_0402_HIGH 1735,2005 r90 top value=0.1
R24 "RES-0402" RES_0402_HIGH 1514.53,2005 r90 top value=0.1
R25 "RES-0402" RES_0402_HIGH 1546.02,2005 r90 top value=0.1
R26 "RES-0402" RES_0402_HIGH 1577.52,2005 r90 top value=0.1
R27 "RES-0402" RES_0402_HIGH 1609.02,2005 r90 top value=0.1
R28 "RES-0402" RES_0402_HIGH 1640.51,2005 r90 top value=0.1
R29 "RES-0402" RES_0402_HIGH 1672.01,2005 r90 top value=0.1
R30 "RES-0402" RES_0402_HIGH 1703.5,2005 r90 top value=0.1
R31 "RES-0402" RES_0402_HIGH 1766.5,2005 r90 top value=0.1
R32 "RES-0402" RES_0402_HIGH 1371.92,1787.06 r90 top value=680
R33 "RES-0402" RES_0402_HIGH 1438.85,1507.54 r0 top value=50
R34 "RES-0402" RES_0402_HIGH 1371.92,1865.8 r90 top value=220
R35 "RES-0402" RES_0402_HIGH 1348.3,1716.2 r90 top value=50
R36 "RES-0402" RES_0402_HIGH 1470.35,1578.4 r180 top value=50
R37 "RES-0402" RES_0402_HIGH 1572.71,1865.8 r90 top value=220
R38 "RES-0402" RES_0402_HIGH 1592.39,1716.2 r90 top value=50
R39 "RES-0402" RES_0402_HIGH 1501.84,1507.54 r180 top value=50
R40 "RES-0402" RES_0402_HIGH 1568.77,1787.06 r90 top value=680
R41D "RES-2512-SIDE" RES_2512_SIDE 1276.68,2600.7 r180 bottom (schematic designator R41)
R41V "RES-2512-SIDE" RES_2512_SIDE 1511.74,3221.91 r90 top (schematic designator R41)
R42D "RES-0402" RES_0402_HIGH 1104.44,2616.95 r0 bottom value=1k (schematic designator R42)
R42V "RES-0402" RES_0402_HIGH 1496.76,3393.75 r270 top value=1k (schematic designator R42)
R43D "RES-0402" RES_0402_HIGH 1103.86,2582 r0 bottom value=1k (schematic designator R43)
R43V "RES-0402" RES_0402_HIGH 1528.26,3393.75 r270 top value=1k (schematic designator R43)
R44HD "RES-0402" RES_0402_HIGH 2130.4,2655.71 r270 top value=0 (schematic designator R44)
R44LD "RES-0402" RES_0402_HIGH 2036.65,2070.35 r270 top value=0 (schematic designator R44)
R45HD "RES-0402" RES_0402_HIGH 2081.71,2654.05 r180 top value=100 (schematic designator R45)
R45LD "RES-0402" RES_0402_HIGH 1986.61,2070 r180 top value=100 (schematic designator R45)
R46HD "RES-0402" RES_0402_HIGH 2081.43,2622.14 r180 top value=33 (schematic designator R46)
R46LD "RES-0402" RES_0402_HIGH 1986.58,1999.56 r180 top value=33 (schematic designator R46)
R47HD "RES-0402" RES_0402_HIGH 2082.99,2586.92 r180 top value=20 (schematic designator R47)
R47LD "RES-0402" RES_0402_HIGH 1986.61,2035.74 r180 top value=20 (schematic designator R47)
R48HD "RES-0402" RES_0402_HIGH 2081.87,2685.54 r180 top value=0 (schematic designator R48)
R48LD "RES-0402" RES_0402_HIGH 1986.42,2105.76 r180 top value=0 (schematic designator R48)
R49 "RES-0402" RES_0402_HIGH 1182,2005 r90 top value=0.1
R50 "RES-0402" RES_0402_HIGH 1214,2005 r90 top value=0.1
R51 "RES-0402" RES_0402_HIGH 1246,2005 r90 top value=0.1
R52 "RES-0402" RES_0402_HIGH 1278,2005 r90 top value=0.1
R53 "RES-0402" RES_0402_HIGH 1310,2005 r90 top value=0.1
R54 "RES-0402" RES_0402_HIGH 1150,2005 r90 top value=0.1
R55 "RES-0402" RES_0402_HIGH 1342,2005 r90 top value=0.1
R56 "RES-0402" RES_0402_HIGH 1374,2005 r90 top value=0.1
R57 "RES-0402" RES_0402_HIGH 1406,2005 r90 top value=0.1
R58 "RES-0402" RES_0402_HIGH 1438,2005 r90 top value=0.1
RSET1 "RES-0603" RES_0603_MED 2742.02,1448 r270 top value=1k
RSET2 "RES-0603" RES_0603_MED 2753,3664 r180 top value=1k
RSET3 "RES-0603" RES_0603_MED 3000.02,1607 r90 top value=1k
RSET4 "RES-0603" RES_0603_MED 2810,3040 r270 top value=1k
"Sig V+1" "Testpoint" Testpoint-Footprint-1 2909,2384 r0 top
SigGND1 "Testpoint" Testpoint-Footprint-1 2818,2773 r0 top
SigGND2 "Testpoint" Testpoint-Footprint-1 2819,2601 r0 top
SigGND3 "Testpoint" Testpoint-Footprint-1 2727,2169 r0 top
SigGND4 "Testpoint" Testpoint-Footprint-1 2726,2017 r0 top
Source1 "Testpoint" Testpoint-Footprint-1 1248,2070 r180 top
U1 "AZ1117H-ADJTRE1" SOT-223 2385.63,1358.56 r180 top
U2 "AZ1117H-ADJTRE1" SOT-223 2491.59,3469.7 r180 top
U3 "MAX1735EUK50+T" FP-U5-2-IPC_B 2894.34,1604.08 r90 top
U4 "MAX1735EUK50+T" FP-U5-2-IPC_B 2631.48,3136.59 r270 bottom
U5 "AZ1117IH-5.0TRG1" SOT230P700X180-4N 913,1414.84 r90 top
U6 "THS4508RGTT" QFN-16 1470.35,1787.06 r0 top
U7HD "ADUM4121ARIZ-RL" SOIC-8_WIDE 2383.52,2684.18 r180 top (schematic designator U7)
U7LD "ADUM4121ARIZ-RL" SOIC-8_WIDE 2294.23,2092.56 r180 top (schematic designator U7)
Vdd1 "Testpoint" Testpoint-Footprint-1 380,2930 r0 top
VR1 "RES_POT_JLEAD" TRIM_J-LEAD 2628.58,1425.39 r0 top value=500
VR2 "RES_POT_JLEAD" TRIM_J-LEAD 2740,3480 r0 top value=500
VR3 "RES_POT_JLEAD" TRIM_J-LEAD 3116.61,1645 r0 top value=5k
VR4 "RES_POT_JLEAD" TRIM_J-LEAD 2650,3050 r90 top value=5k

## Footprints (in the part's own frame and the unit in brackets; to place one, negate y for a bottom-side part, rotate by r counter-clockwise, add the part's x,y. Pads: shape width x height; smd on the part's side, far side on the other; paste and mask are expansions set on the pad)
CAP_0402_HIGH [mm] "SMD Capacitor 0402 (1005 Metric) - High Density"
  rect 0.52x0.52 smd: 1(-0.41,0) 2(0.41,0)
  body extent -0.53,-0.28 0.53,0.28, height 0.55
CAP_0603_HIGH [mm] "SMD Capacitor 0603 (1608 Metric) - High Density"
  rect 0.75x0.85 smd: 1(-0.625,0) 2(0.625,0)
  body extent -0.85,-0.45 0.85,0.45, height 0.9
CAP_0805_MED [mm] "SMD Capacitor 0805 (2013 Metric) - Medium Density"
  rect 1x1.45 smd: 1(-0.95,0) 2(0.95,0)
  silkscreen extent -0.9,-0.9 0.9,0.9, body extent -1.35,-0.8 1.35,0.8, height 0.25
CAP_1206_HV [mm] "SMD Capacitor 1206 (3216 Metric) - High Voltage"
  rect 0.45x1.7 smd: 1(-1.575,0) 2(1.575,0)
  silkscreen extent -0.9,-0.75 0.9,0.75, body extent -1.7,-0.9 1.7,0.9, height 1.8
CAP_1812 [mm] "Non Polarized SMD Capacitor 1812 (4532 Metric)"
  rrect50% 1.7x3.8 smd paste+0 mask+0: 1(-2.15,0) 2(2.15,0)
  silkscreen extent -0.85,-1.8 0.85,1.8, body extent -2.25,-1.7 2.25,1.7, height 0.6
CONN_PAD [mm] "Generic Exposed Pad for connecting a Load (30A out)"
  rrect50% 8x4.5 smd paste-2.25: 1(0,0)
DFN_8X8 [mm] "DFN, 4-Leads, Body 8.00x8.00mm, Pitch 7.95mm, IPC Medium Density"
  rect 1.65x1.35 smd: 1(-3.975,3) 2(-3.975,1) 3(-3.975,-1) 4(-3.975,-3) 5(3.975,-3) 6(3.975,-1) 7(3.975,1) 8(3.975,3)
  rect 3.2x7 smd: 9(-0.91,0)
  silkscreen extent -4.05,-4 4,4.45, body extent -4,-4 4,4, height 0.45
DIO_SOD-323F [mm] "SOD-323F Small outline diode"
  rect 0.9x0.8 smd paste+0 mask+0: 1(-1.1,0) 2(1.1,0)
  silkscreen extent -1.8,-0.7 -1.8,0.7, body extent -1.1,-0.9 1.1,0.9, height 0.25
DIO_SOD-923F [mil] "SOD-923F Small outline diode"
  rect 15.5x28 smd paste+0 mask+0: 1(-13.75,0) 2(13.75,0)
  silkscreen extent -31,-10 -31,10, body extent -20,-12 20,12, height 10
FP-U5-2-IPC_B [mm]
  rect 1.505x0.576 smd paste+0 mask+0: 1(-1.1,0.95)
  rrect100% 1.505x0.576 smd paste+0 mask+0: 2(-1.1,0) 3(-1.1,-0.95) 4(1.1,-0.95) 5(1.1,0.95)
  silkscreen extent -2.48,-1.7 1.4,1.7, body extent -2.1,-1.7 2.1,1.7, height 0.25
J_TERM_BLK_1X2 [mm] "PCB 1X2 Terminal block"
  round 2.5 hole 1.4: 1(-3.175,0) 2(3.175,0)
  silkscreen extent -6.5,-8.4 6.5,4.6, body extent -6.4,-8.3 6.4,4.5, height 21
J_THT_1_PIN [mm] "M/F Pin Header 1 Pin"
  round 1.3 hole 0.8 paste-1000 mask+0: 1(0,0)
  silkscreen extent -1,-1 1,1, body extent -1.02,-1 1.02,1, height 0.25
J_THT_2.54MM_1X2 [mm] "M/F Pin Header 2.54mm pitch, 1X2"
  rect 1.3x1.3 hole 0.8 paste-1000 mask+0: 1(-2.54,0)
  round 1.3 hole 0.8 paste-1000 mask+0: 2(0,0)
  silkscreen extent -3.43,-1.1 0.89,1.1, body extent -3.43,-1.2 1.02,1.2, height 0.25
"Mounting Hole-Footprint-1" [mm]
  round 6 hole 3.6: 1(0,0)
PCAP_2MM_5MM [mm] "Polarized Capacitor THT - 2-Leads, Dia 5mm, Pin Spacing 2mm"
  rect 1.3x1.3 hole 0.8: 1(-1,0)
  round 1.3 hole 0.8: 2(1,0)
  silkscreen extent -2.5,-2.5 2.5,2.5, body extent -2.5,-2.5 2.45,2.5, height 12
QFN-16 [mm] "QFN-16  3mmX3mm"
  rrect25% 0.86x0.26 smd paste-0.032 mask+0.05: 1(-1.45,0.75) 2(-1.45,0.25) 3(-1.45,-0.25) 4(-1.45,-0.75) 9(1.45,-0.75) 10(1.45,-0.25) 11(1.45,0.25) 12(1.45,0.75)
  rrect25% 0.26x0.86 smd paste-0.032 mask+0.05: 5(-0.75,-1.45) 6(-0.25,-1.45) 7(0.25,-1.45) 8(0.75,-1.45) 13(0.75,1.45) 14(0.25,1.45) 15(-0.25,1.45) 16(-0.75,1.45)
  rect 1.4x1.4 smd paste-2 mask+0.05: 17(0,0)
  round 0.6 hole 0.3 mask+0.102: 18(-0.4,0.4) 19(0.4,0.4) 20(0.4,-0.4) 21(-0.4,-0.4)
  silkscreen extent -1.82,-1.5 1.5,1.82, body extent -1.5,-1.5 1.5,1.5, height 2
RES_0402_HIGH [mm] "SMD Resistor 0402 (1005 Metric) - High Density"
  rect 0.45x0.45 smd: 1(-0.4,0) 2(0.4,0)
  body extent -0.53,-0.28 0.53,0.28, height 0.4
RES_0603_MED [mm] "SMD Resistor 0603 (1608 Metric) - Medium Density"
  rect 0.95x0.95 smd: 1(-0.75,0) 2(0.75,0)
  body extent -0.87,-0.48 0.87,0.48, height 0.55
RES_1206_MED [mm] "SMD Resistor 1206 (3216 Metric) - Medium Density"
  rect 1.15x1.75 smd: 1(-1.425,0) 2(1.425,0)
  silkscreen extent -0.45,-0.77 0.45,0.77, body extent -1.65,-0.87 1.65,0.87, height 0.6
RES_2512_MED [mm] "SMD Resistor 2512 (6432 Metric) - Medium Density"
  rect 1.25x3.4 smd: 1(-3.05,0) 2(3.05,0)
  silkscreen extent -1,-1.7 1,1.7, body extent -3.05,-1.7 3.05,1.7, height 0.25
RES_2512_SIDE [mm] "SMD Resistor 2512 (6432 Metric) - On its side"
  rect 1x1 smd: 1(-2.85,0) 2(2.85,0)
  silkscreen extent -3,-0.7 3,0.7, body extent -3.05,-0.7 3.05,0.7, height 0.25
SMA_VERT_F [mil] "SMA Vertical Connector, Female"
  round 79 hole 59: 1(0,0)
  round 75 hole 59.06 mask+0: 2(-100.5,100.5) 3(100.5,100.5) 4(-100.5,-100.5) 5(100.5,-100.5)
  silkscreen extent -143,-143 143,143, body extent 0,0 10,10, height 10
SOIC-8_WIDE [mil] "SOIC-8 Wide body"
  rect 65.16x22.92 smd paste+0 mask+0: 1(-188.21,75)
  rrect100% 65.16x22.92 smd paste+0 mask+0: 2(-188.21,25) 3(-188.21,-25) 4(-188.21,-75) 5(188.21,-75) 6(188.21,-25) 7(188.21,25) 8(188.21,75)
  silkscreen extent -245,-115 136,115, body extent -190,-125 190,125, height 10
SOT230P700X180-4N [mm] "SOT223, 4-Leads, Body 6.50x7.00mm (avg), Pitch 2.30mm, IPC Medium Density"
  rect 2.15x1 smd: 1(-2.925,2.3) 2(-2.925,0) 3(-2.925,-2.3)
  rect 2.15x3.25 smd: 4(2.925,0)
  silkscreen extent -3.05,-3.35 1.55,3.47, body extent -1.85,-3.35 1.85,3.35, height 1.8
SOT-223 [mm] "SOT-223"
  rect 1.2x1.6 smd: 1(-2.3,-3.2) 2(0,-3.2) 3(2.3,-3.2)
  rect 3.3x1.6 smd: 4(0,3.2)
  silkscreen extent -3.94,-1.7 3.3,1.8, body extent -3.43,-3.3 3.56,3.18, height 0.25
Testpoint-Footprint-1 [mm]
  round 1.3 smd: 1(0,0)
TRIM_J-LEAD [mm] "3mm SMD J-Lead Trim Pot"
  rect 1.2x1.2 smd: 1(-1,-1.8) 2(1,-1.8)
  rect 1.524x1.524 smd: 3(0,1.5)
  silkscreen extent -2,-2.7 2,2.5, body extent -1.9,-2.6 1.9,1.9, height 5

## Part data
"+5 V" "H +V1" "H -V1" H_Gate1 H_SS1 H_SS2 H_SS3 HSig1 "L +V1" "L -V1" L_Gate1 L_SS1 L_SS2 L_SS3 LSig1 nHSig1 nLSig1 PGND1 PGND2 PGND3 "Sig V+1" SigGND1 SigGND2 SigGND3 SigGND4 Source1 Vdd1: library part CMP-001-0000-5, "testpoint for circuit"
+5V +VIN GND J9 J13 J17 J19 L_+VIN L_-VIN L_SS L_SS L_SS4 PGND PGND4 PGND5 PGND6 PGND7: library part CMP-002-00072-1, "Male Pin, 1 Pin"
C1 C2 C3 C4 C6 C7 C72 C73 C74 C75: library part CMP-001-00088-2, "Non polarized SMD capacitor - 1812 (4532 Metric)", Package=1812
C5 C8 C11 C12 C13 C14 C15 C16 C17 C18 C21 C22 C23 C24 C25 C26 C27 C28 C29 C30 C31 C32 C33 C34 C40 C41 C42 C43 C44 C45 C46 C47 C49 C52 C53 C54: library part CMP-001-00086-3, "Non polarized SMD capacitor - 0805 (1608 Metric)", Package=0805
C19 C20 C35 C36 C37 C38 C50 C51 C55 C56 C57 C63HD C63LD C64HD C64LD C65HD C65LD C66HD C66LD C67HD C67LD C68HD C68LD C69HD C69LD C70HD C70LD C71HD C71LD: library part CMP-001-00084-2, "Non polarized SMD capacitor - 0603 (1608 Metric)", Package=0603
C39: library part CMP-001-00089-1, "Non polarized SMD capacitor - 1206 (3216 Metric) High Voltage", Package=1206, Voltage Rating=1kV
C48: library part CMP-001-00091-1, "Polarized THT capacitor - Radial can, 2mm lead spacing, 5mm diameter"
C58 C59 C60 C61 C62: library part CMP-001-00083-3, "Non polarized SMD capacitor - 0402 (1005 Metric)", Package=0402
D1HD D1LD: library part CMP-004-00031-2, "Low VF SMD Schottky Barrier Diode", Package=SOD-923F
D2HD D2LD D3HD D3LD: library part CMP-004-00032-1, "Generic SOD-323F Zener diode", Package=SOD-323F
FB1HD FB1LD R2 R3 R4 R5 R6 R7 R10 R13 R14 R16 R17 R18 R19 R21 R22 R23 R24 R25 R26 R27 R28 R29 R30 R31 R32 R33 R34 R35 R36 R37 R38 R39 R40 R42D R42V R43D R43V R44HD R44LD R45HD R45LD R46HD R46LD R47HD R47LD R48HD R48LD R49 R50 R51 R52 R53 R54 R55 R56 R57 R58: library part CMP-009-00177-2, "SMD Resistor - 0402 (1005 Metric)", Package=0402
G1 G2: library part CMP-023-000000-5, "650V 15A GaN Enhancement mode Transistor", Package=DFN8X8
J1 J3: library part CMP-002-00071-1, "Terminal Block 1X2, 6.35mm pitch"
J2 J6 J14 J20: library part CMP-002-00074-4, "Solderable Connection Pad"
J4 J10: library part CMP-002-00073-2, "Male Pin 2.54mm pitch 1X2"
J21 J22: library part CMP-025-000000-6, "SMA connector, Vertical, Female", Package=SMA
MH1 MH2 MH3 MH4 MH7 MH8: library part CMP-032-000006-1
R1: library part CMP-009-00182-3, "SMD Resistor - 2512 (6432 Metric)", Package=2512
R8 R9 R11 R12 RSET1 RSET2 RSET3 RSET4: library part CMP-009-00178-2, "SMD Resistor - 0603 (1608 Metric)", Package=0603
R15 R20: library part CMP-009-00180-2, "SMD Resistor - 1206 (3216 Metric)", Package=1206
R41D R41V: library part CMP-009-00183-1, "SMD Resistor - 2512 (6432) On It's Side", Package=2512
U1 U2: library part CMP-019-00050-1, "IC REG LINEAR POS ADJ 1A SOT223", Package=SOT223
U3 U4: library part CMP-05721-000044-1, "IC REG LIN NEG ADJ 200MA SOT23-5"
U5: library part CMP-032-000005-2, "https://www.digikey.ca/en/products/detail/diodes-incorporated/AZ1117IH-5-0TRG1/5699673"
U6: library part CMP-027-000000-12, "WIDEBAND, LOW NOISE, LOW DISTORTION FULLY DIFFERENTIAL AMPLIFIER", Package=QFN3X3
U7HD U7LD: library part CMP-019-000000-4, "DGTL ISO 5KV 1CH GATE DRVR 8SOIC", Package="8-SOIC WIDE"
VR1 VR2 VR3 VR4: library part CMP-009-00181-2, "Potentiometer, J-Lead Trim Pot"

## Via types
v1: diameter 23.62, hole 11.81, Top Layer to Bottom Layer, tented both sides, 744 vias
v2: diameter 23.62, hole 11.81, Top Layer to Bottom Layer, 15 vias

## Nets (pads, with @x,y where several pads share a name; then routed paths per layer and width w, separated by ;. In a path a pad name is that pad's centre, name@x,y a point inside that pad or via, vN(x,y) a via of type N, cw(c..) or ccw(c..) an arc to the next point about the centre after c; other vN are vias at no path point)
+5: "+5 V.1" C5.2 C8.2 C51.2 C52.2 C55.2 C56.2 C57.2 U5.2 U5.4 U6.5 U6.6 U6.7 U6.8 U6.12 | length 1157.1
  Top Layer w9.84: v1@1533.34,1838.24 v1(1537.28,1842.18)
  Top Layer w11.81: U6.12@1527.43,1816.59 1527.43,1832.34 v1@1533.34,1838.24
  Top Layer w31.5: C51.2@870,1220 870,1234.05 909.06,1273.11 909.06,1295.75 U5.2@913,1299.68 ; 910,1660 915.33,1660 935.33,1640 964.38,1640 977.85,1626.54 1016.06,1626.54 C52.2@1020,1622.6 1028.86,1622.6 C52.2@1047.83,1603.62
  Layer 2 w31.5: v1(870,1600) 1210,1600 1300,1690 1420,1690 ; v1(1420,1720) 1420,1690 ; v1(1537.28,1842.18) 1525,1829.91 1525,1708.45 1506.55,1690 v1(1496,1690) v1(1446,1690) 1420,1690
  other v2: 1000,1590 1060,1590 1140,1590 1210,1590
+5_SIG: "Sig V+1.1" +5V.1 C29.1 C30.1 C67HD.1 C67LD.1 R3.2 R6.2 R14.2 R18.2 U7HD.1 U7LD.1 | length 525.7
  Top Layer w7.28: U7LD.1@2482.44,2017.56 2482.44,1969.92 2510.39,1941.97 C67LD.1@2510.39,1940 ; U7HD.1@2571.74,2609.18 2582.18,2609.18 2590,2601.36 2590,2534.61 C67HD.1@2585.39,2530 2590,2525.39 v1(2590,2500) ; v1(2682.36,2596.46) 2683.68,2597.78 2683.68,2622.93 R3.2@2685,2624.25 ; R6.2@2685,2745.5 v1(2685,2775) ; C29.1@2735,2342.6 C30.1@2825,2342.6 2870.7,2342.6 2909,2380.9 2909,2384
  Top Layer w20: v1(2595,2011) R14.2@2595,2040.25 ; R18.2@2595,2145.75 v1(2595,2175)
  other v1: 2465,1980 2510,1980 2720,2300 2755,2300 2805,2300 2840,2300 2556.61,2575
+VIN: +VIN.1 C46.1 C47.1 C48.1 C49.2 C50.2 U5.3
GND_SIG: C29.2 C30.2 C67HD.2 C67LD.2 GND.1 R2.1 R10.1 R13.1 R21.1 SigGND1.1 SigGND2.1 SigGND3.1 SigGND4.1 U7HD.4 U7LD.4 | length 361.1
  Top Layer w7.28: v1(2560,2010.75) R13.1@2560,2040 ; C67HD.2@2634.61,2530 2634.61,2554.61 v1(2640,2560) ; v1(2645,2775) 2647.5,2772.5 2647.5,2748.25 R10.1@2650,2745.75 ; v1(2648.31,2596.46) 2649.15,2597.3 2649.15,2623.41 R2.1@2650,2624.25 ; v1(2725,2060) 2725.5,2059.5 2725.5,2017.5 SigGND4.1@2726,2017 ; v1(2727,2126) SigGND3.1@2727,2169 ; v1(2818,2728) SigGND1.1@2818,2773 ; SigGND2.1@2819,2601 v1(2819,2645)
  Top Layer w11.81: C67LD.2@2559.61,1940 2559.8,1940.2 2559.8,1974.8 v1(2560,1975) ; R21.1@2560,2145.75 v1(2560,2175)
  other v1: 2820,1950 2950,1950 2890,2000 3120,2030 3250,2030 2820,2050 2950,2050 3190,2080 3120,2130 3250,2130 2466.61,2200 2501.61,2200 2920,2220 3050,2220 2990,2270 2540,2320 2670,2320 2920,2320 3050,2320 2610,2370 2540,2420 2670,2420 2720,2460 2760,2460 2805,2460 2840,2460 2910,2460 3040,2460 2980,2510 2910,2560 3040,2560 2910,2740 3030,2740 2561.87,2785.43 2597.06,2785.81
H_+V: "H +V1.1" C17.1 C18.1 C40.1 C41.1 C63HD.2 C64HD.2 C65HD.2 C66HD.2 U2.2 U2.4 U7HD.8 VR2.1 | length 979.9
  Top Layer w7.28: C63HD.2@2171.61,2534.61 2172.74,2535.73 2216.94,2535.73 C64HD.2@2217.49,2535.18 ; U7HD.8@2195.31,2609.18 2197.16,2611.03 U7HD.8@2218.82,2611.03 ; U7HD.8@2216.98,2609.18 U7HD.8@2220.66,2609.18 ; U7HD.8@2224.13,2609.2 2231.35,2601.97 C64HD.2@2231.35,2539.04 ; C64HD.2@2227.5,2535.18 C64HD.2@2231.35,2539.04 ; C65HD.2@2261.82,2534.77 2235.62,2534.77 C64HD.2@2231.35,2539.04 ; C65HD.2@2261.82,2534.77 2309.46,2534.79 2320.58,2545.91 2320.58,2860.58 2364.2,2904.2 2364.2,3035 2364.2,3110 2364.2,3184.56 C17.1@2364.2,3259
H_+VIN: C15.1 C16.1 C45.1 J9.1 U2.3 | length 228.5
  Top Layer w7.28: C15.1@2377.59,3670.91 2382.65,3670.91 C15.1@2401.69,3651.86 ; U2.3@2401.04,3595.68 2401.04,3638.1 2401.69,3638.75 C15.1@2401.69,3651.86 ; C16.1@2454.59,3667.91 2529.59,3667.91 C45.1@2532.59,3670.91 ; C16.1@2454.59,3670.91 2439.82,3656.13 2405.96,3656.13 C15.1@2401.69,3651.86
H_-V: "H -V1.1" C27.1 C28.1 C42.1 C43.1 C68HD.1 C69HD.1 C70HD.1 C71HD.1 U4.5 U7HD.5 VR4.2 VR4.3
  other v1: 2250,2760 2220,2790 2260.6,2803.92 2260,2850 2260,2900 2610,3000 2650,3000
H_-VIN: C25.1 C26.1 C54.2 J19.1 R9.1 U4.2
H_SS: C15.2 C16.2 C17.2 C18.2 C20.1 C25.2 C26.2 C27.2 C28.2 C37.1 C38.1 C40.2 C41.2 C42.2 C43.2 C45.2 C54.1 C63HD.1 C64HD.1 C65HD.1 C66HD.1 C68HD.2 C69HD.2 C70HD.2 C71HD.2 D3HD.1 G1.3 H_SS1.1 H_SS2.1 H_SS3.1 J13.1 J17.1 R7.1 R12.2 RSET2.1 RSET4.1 U4.1 | length 847.7
  Top Layer w7.28: G1.3@1920.51,2609.28 1920.51,2603.37 1943.44,2580.44 1949.26,2580.44 1978.7,2551 1978.7,2515.3 1987,2507 H_SS3.1@1980,2500 ; C63HD.1@2171.61,2485.39 2171.78,2485.56 2217.07,2485.56 C64HD.1@2217.49,2485.97 2217.9,2485.56 C65HD.1@2261.82,2485.56 ; C71HD.2@2179.78,2835.2 2180,2835.42 C70HD.2@2180,2880 ; C65HD.1@2261.82,2485.56 C66HD.1@2307.49,2485.58 ; C15.2@2377.59,3745.71 C45.2@2532.59,3745.71 ; v1(2455,3145) 2457.5,3142.5 C41.2@2457.5,3110
  Top Layer w20: C20.1@2771.61,3610 v1(2810,3610)
  Top Layer w25: H_SS2.1@2430,2960 H_SS2.1@2434.2,2964.2 ; RSET2.1@2782.53,3664 2788.53,3670 v1(2830,3670)
  Bottom Layer w7.28: v1(2570,3210) 2574.42,3210 2578.51,3205.91 2586.38,3205.91 2594.07,3198.22 U4.1@2594.07,3179.92
  Bottom Layer w20: C38.1@2730,3104.61 C37.1@2730,3145.39 2731.97,3145.39 2746.89,3130.47 R12.2@2780,3130.47 2795.06,3115.41 2810.17,3115.41 2815.58,3110 v1(2820,3110)
  Bottom Layer w25: H_SS1.1@2400,2960 2400,2967.08 2422.82,2989.9 2422.82,2992.82 2425,2995
  other v1: 2023.94,2457.87 2155,2460 2187.49,2460.58 2217.49,2460.58 2247.49,2460.58 2277.49,2460.58 2307.49,2460.58 2140,2490 1915,2540 1900,2565 1930,2565 1950,2590 2160,2800 2160,2830 2160,2860 2263.78,2944.88 2450,2995 2909.76,3048.43 2425,3070 2455,3070 2850,3070 2770,3090 2900,3140 2425,3145 2958.98,3146.85 2570,3150 2570,3180 2425,3220 2455,3220 2650,3320 2730,3320 2820,3320 2860.55,3343.7 2958.98,3343.7 2650,3350 2730,3350 2820,3350 2860,3440 2909.76,3442.13 2380,3510 2590,3510 2565.28,3540.55 2663.7,3540.55 2860.55,3540.55 2958.98,3540.55 2909.76,3638.98 2350,3790 2390,3790 2430,3790 2470,3790 2510,3790 2550,3790 2430,3830 2500,3830 2590,3830 2660,3830 2740,3830 2810,3830
L_+V: "L +V1.1" C13.1 C14.1 C31.1 C32.1 C63LD.2 C64LD.2 C65LD.2 C66LD.2 U1.2 U1.4 U7LD.8 VR1.1 | length 1396.5
  Top Layer w30: C63LD.2@2026.61,1944.61 2026.72,1944.5 2073.91,1944.5 C64LD.2@2074.02,1944.38 2074.11,1944.48 2106.01,1944.48 C66LD.2@2119.91,1944.48 ; U7LD.8@2106.01,2017.56 2106.01,1951.78 2112.61,1951.78 C66LD.2@2119.91,1944.48 ; C65LD.2@2164.09,1944.48 2185.52,1944.48 2250,1880 2250,1811 ; C65LD.2@2165.58,1943.99 2164.09,1943.99 2163.83,1944.24 2120.15,1944.24 C66LD.2@2119.91,1944.48 ; 2248.44,1809.44 2307.47,1750.41 2307.47,1733.45 C31.1@2312.15,1728.77 ; C13.1@2313.02,1652 2327.78,1666.76 2327.78,1710.58 2340.15,1722.96 2340.15,1728.77 2350.07,1728.77 2390,1688.83 2390,1606.65 2368.21,1584.86 C32.1@2368.21,1576 ; C14.1@2314.02,1575 2315.02,1576 C32.1@2368.21,1576 ; U1.4@2385.63,1232.58 2385.63,1356.34 ; VR1.1@2589.21,1354.52 2387.44,1354.52 2385.63,1356.34 ; C32.1@2368.21,1576 2370.17,1574.05 2370.17,1500.01 U1.2@2385.63,1484.55 2385.63,1356.34
L_+VIN: C11.1 C12.1 C44.1 L_+VIN.1 U1.3 | length 276
  Top Layer w9.84: C44.1@2203.11,1324.98 2217.12,1339 2217.12,1388.98 C11.1@2202.36,1403.74 2217.12,1418.5 2217.12,1469.3 C12.1@2202.42,1484 2202.96,1484.55 U1.3@2295.08,1484.55
L_-V: "L -V1.1" C23.1 C24.1 C33.1 C34.1 C68LD.1 C69LD.1 C70LD.1 C71LD.1 U3.5 U7LD.5 VR3.2 VR3.3 | length 1754.5
  Top Layer w19.68: C71LD.1@2065.25,2206.22 2065.07,2206.03 2065.07,2204.75 2066.23,2203.59 2069.53,2206.89 2085.78,2206.89 2093.46,2214.57 2093.57,2214.57 2110.32,2231.32 2112.28,2231.32 C70LD.1@2117.21,2236.24
  Top Layer w25: C68LD.1@2064.61,2250 C68LD.1@2074.61,2250 ; C68LD.1@2074.61,2260 2075.93,2260 2085.62,2250.31 2158.25,2250.31 2160.58,2247.98 2160.58,2238.62 2162.85,2236.36 C69LD.1@2164.81,2236.36 ; 2147.4,2235.93 2129.87,2218.39 2129.87,2214.39 2127.61,2212.13 2127.61,2167.96 2169.69,2167.96 2181.61,2156.03 2181.61,2008.39 2334.97,1855.03 2334.97,1837.54 2335.99,1836.52 2335.99,1818.01 2437.2,1716.8 C34.1@2539.61,1716.8 2540.11,1717.3 2619.11,1717.3 C33.1@2619.61,1717.8 2619.81,1717.6 2699.81,1717.6 C23.1@2700.02,1717.4 2700.23,1717.62 2777.18,1717.62 C24.1@2777.4,1717.84 2777.92,1717.32 2837.95,1717.32 2851.22,1704.06 ; U3.5@2856.94,1647.41 2856.94,1698.33 2851.22,1704.06 ; VR3.2@3155.98,1574.13 3155.98,1664.68 VR3.3@3116.61,1704.06 2851.22,1704.06
L_-VIN: C21.1 C22.1 C53.2 L_-VIN.1 R8.1 U3.2 | length 447
  Top Layer w9.84: U3.2@2897.02,1553.27 2896.8,1553.06 2896.8,1536.54 2897.02,1536.32 2897.02,1505.39 2902.78,1499.62 2903.05,1499.62 2903.05,1475.76 C22.1@2917.82,1461 2917.82,1436.25 2963.24,1436.25 R8.1@2977.02,1422.47 ; L_-VIN.1@2916.4,1181.83 2917.38,1182.8 2917.38,1382.07 C53.2@2918.88,1383.58 2917.38,1385.08 C22.1@2917.38,1436.25
L_Gate: D2LD.1 FB1LD.2 G2.4 L_Gate1.1 R19.2 R48LD.2 | length 357.6
  Top Layer w11.81: R19.2@1887.65,2022.53 1890.6,2025.48 1895.5,2025.48 1897.52,2027.5 1904.72,2027.5 ; FB1LD.2@1933.61,2030.75 1930.66,2027.8 1918.58,2027.8 1918.28,2027.5 1904.72,2027.5 ; L_Gate1.1@1952.8,1943.84 1951.82,1943.84 1910.98,1984.69 1910.98,1999.18 1904.72,2005.43 1904.72,2027.5 ; v1(1991.61,2135) 1991.61,2132.87 1973.62,2114.88 1973.62,2108.72 R48LD.2@1970.67,2105.76 1925.39,2105.76 1904.72,2085.1 G2.4@1904.72,2083.5 1904.72,2027.5
  Bottom Layer w11.81: D2LD.1@1960.61,2142.31 1967.92,2135 v1(1991.61,2135)